# EAGLE board ESP32_BLDC_Motor_Driver-Panel (EAGLE 9.6.2), part 1 of 4
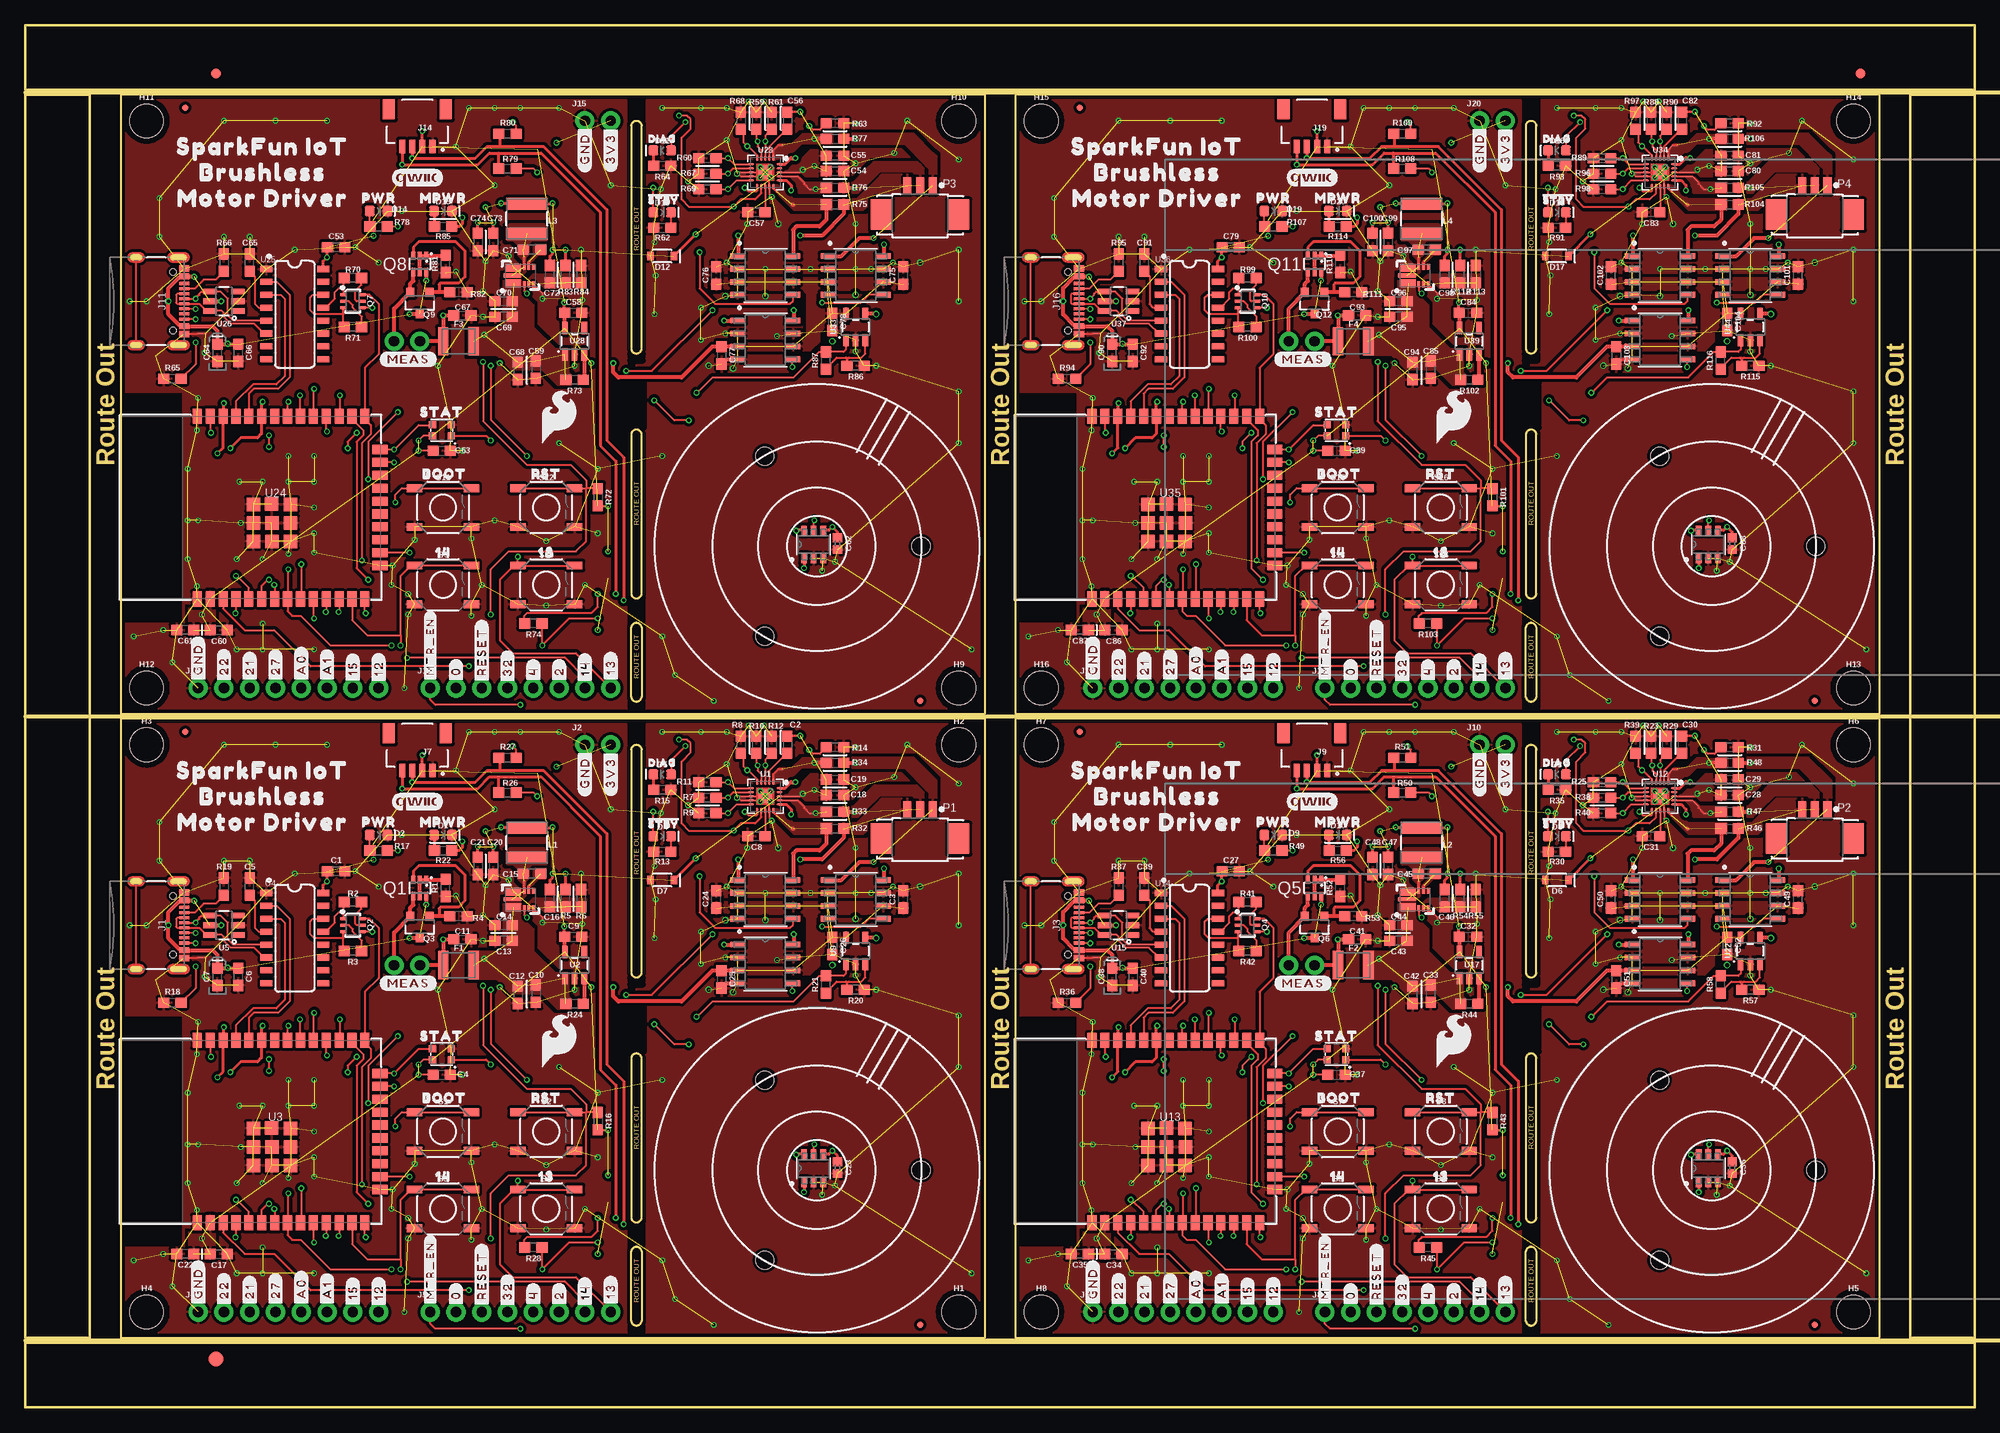
[diagram p0: board, top side]
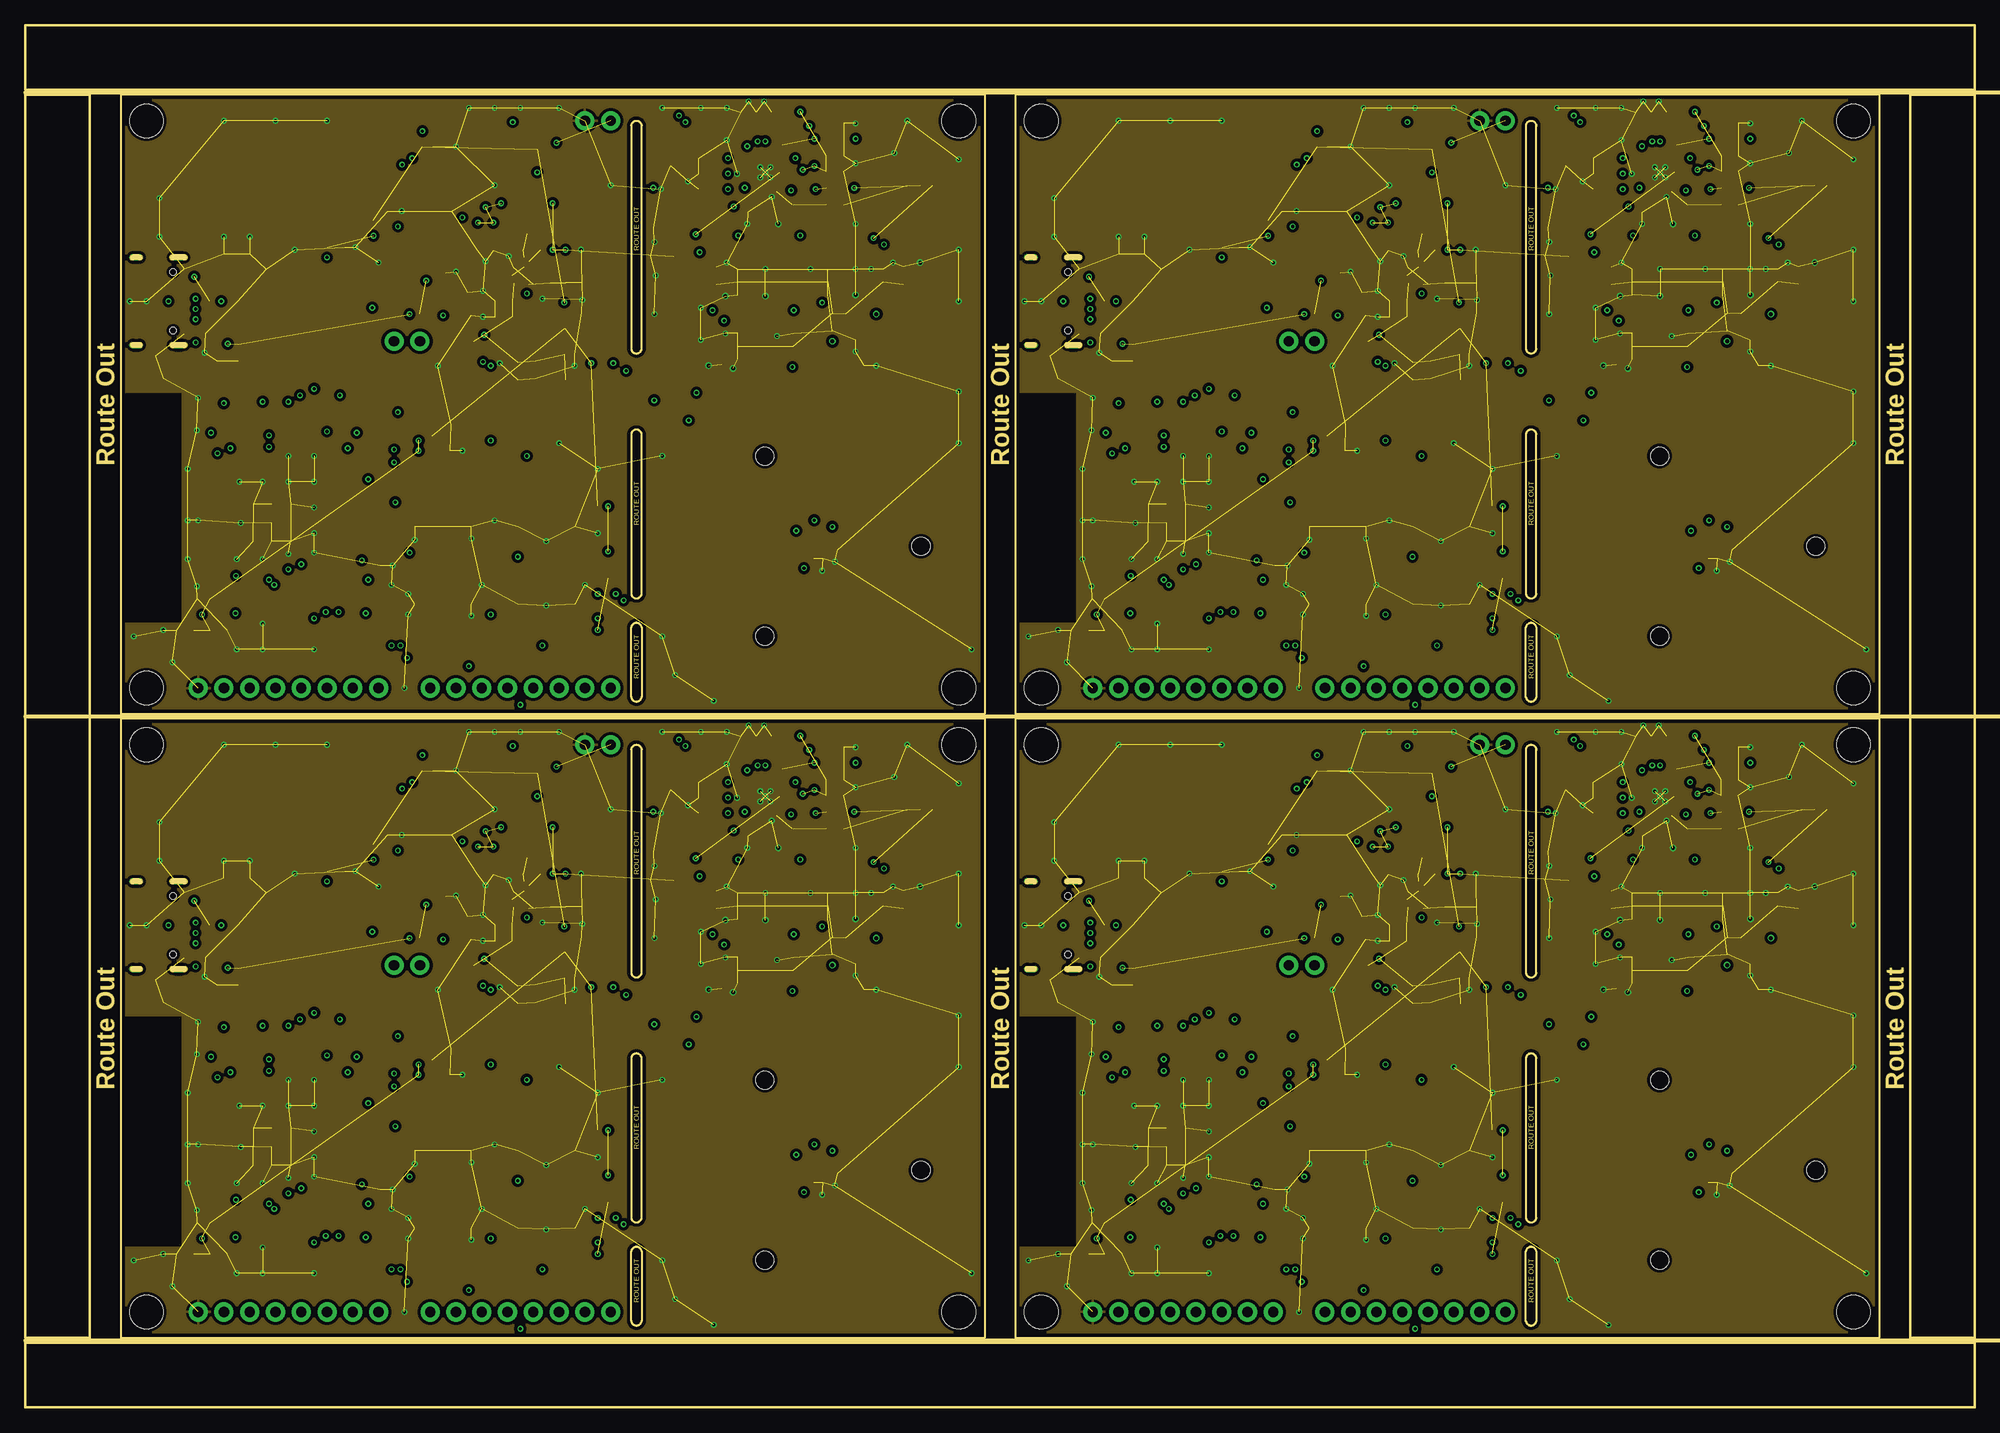
[diagram p1: board, inner layer Route2]
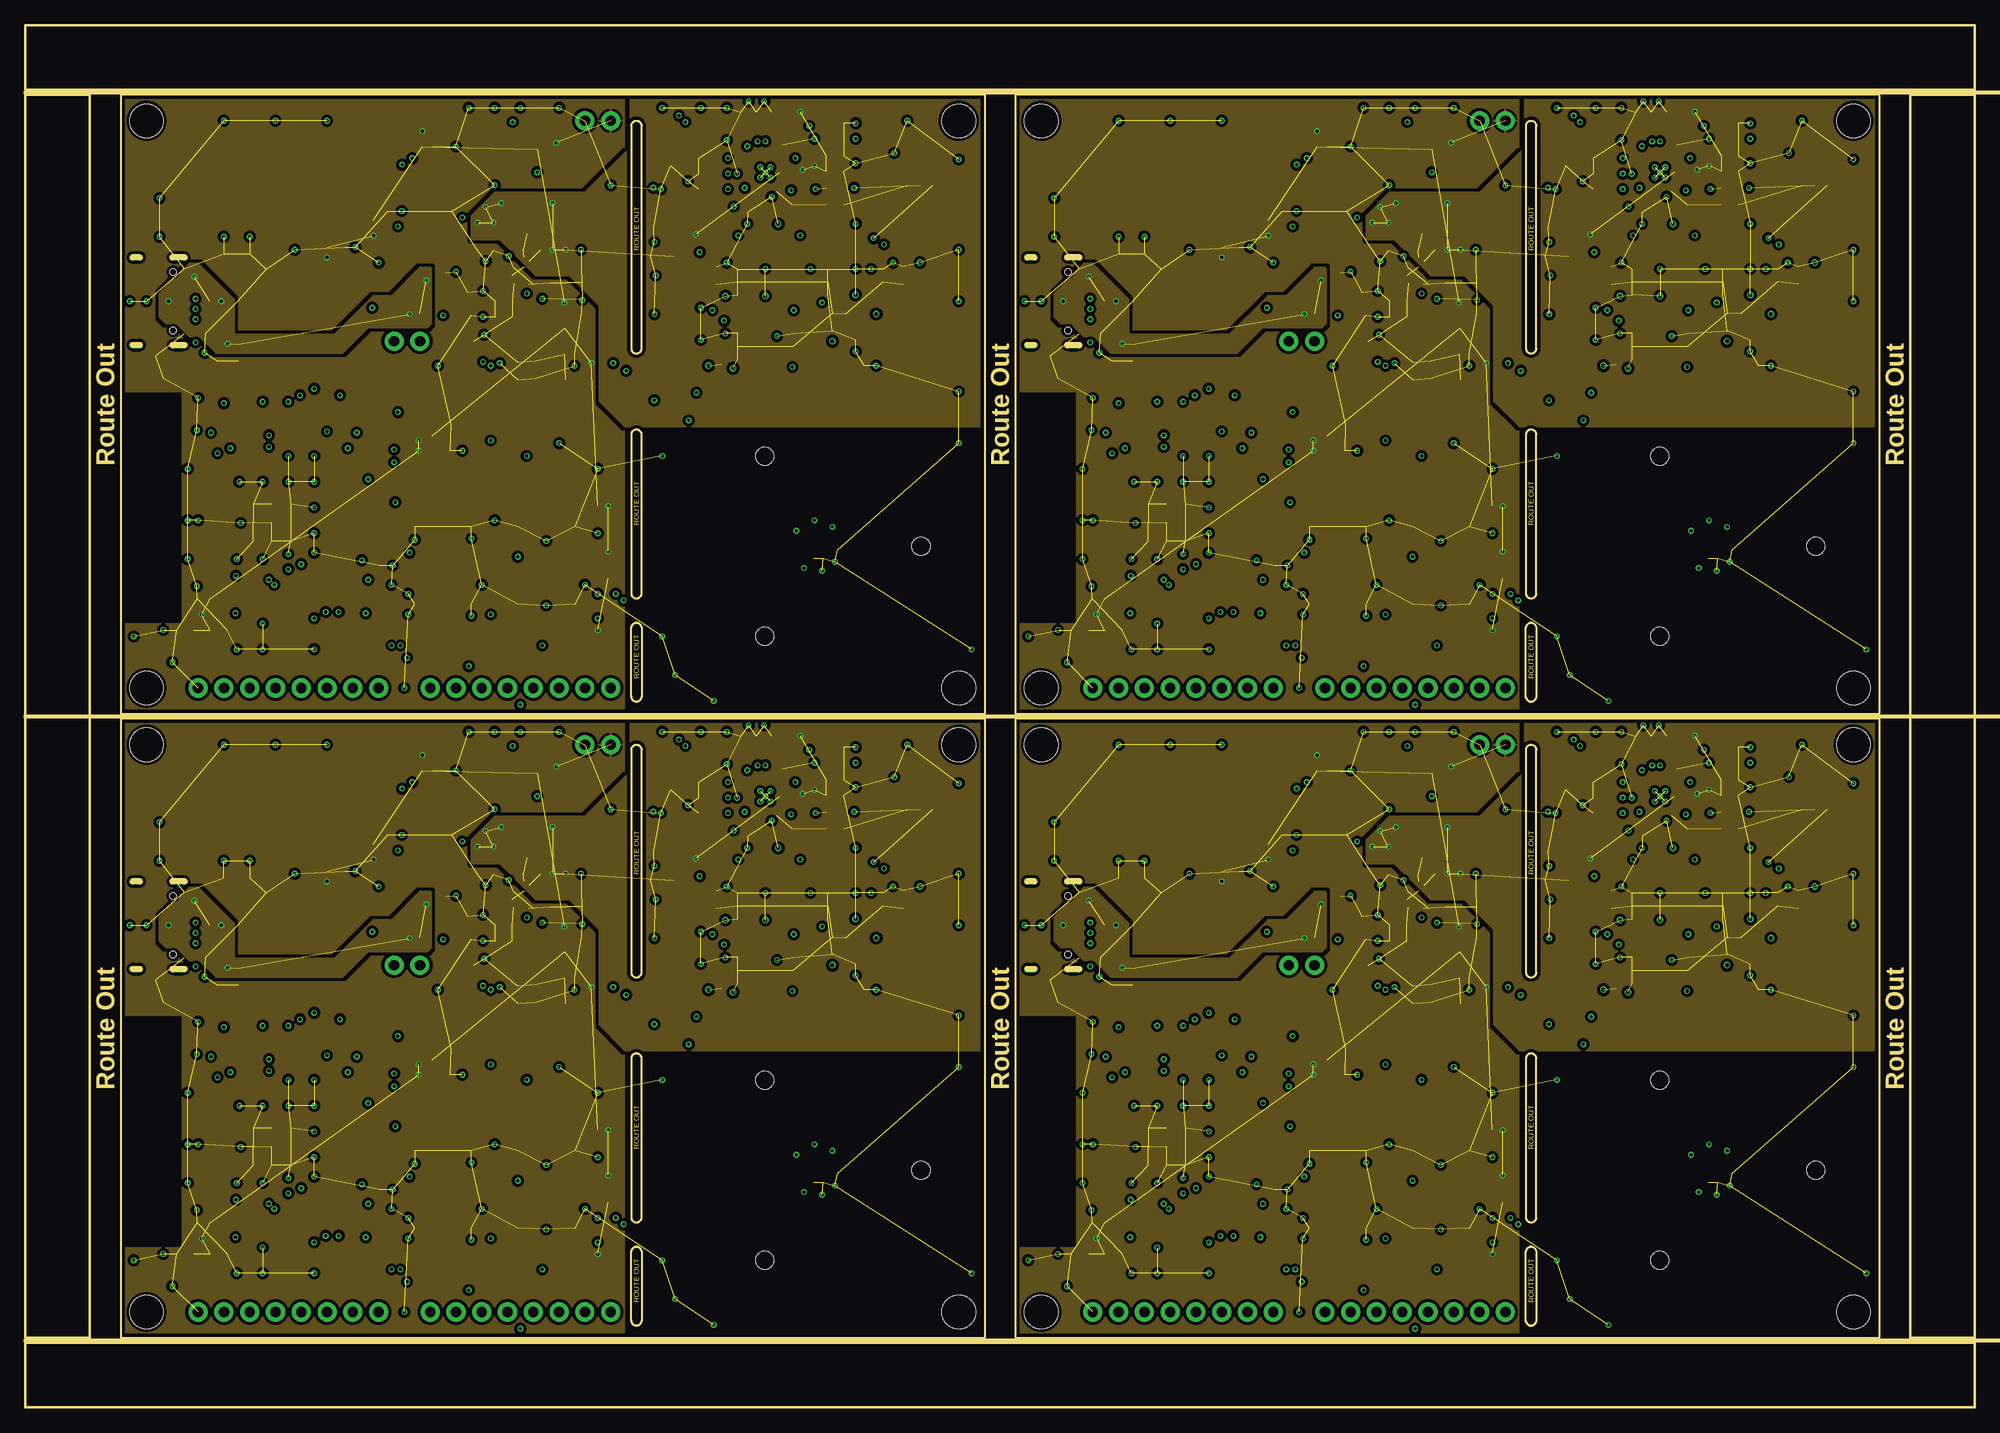
[diagram p2: board, inner layer Route15]
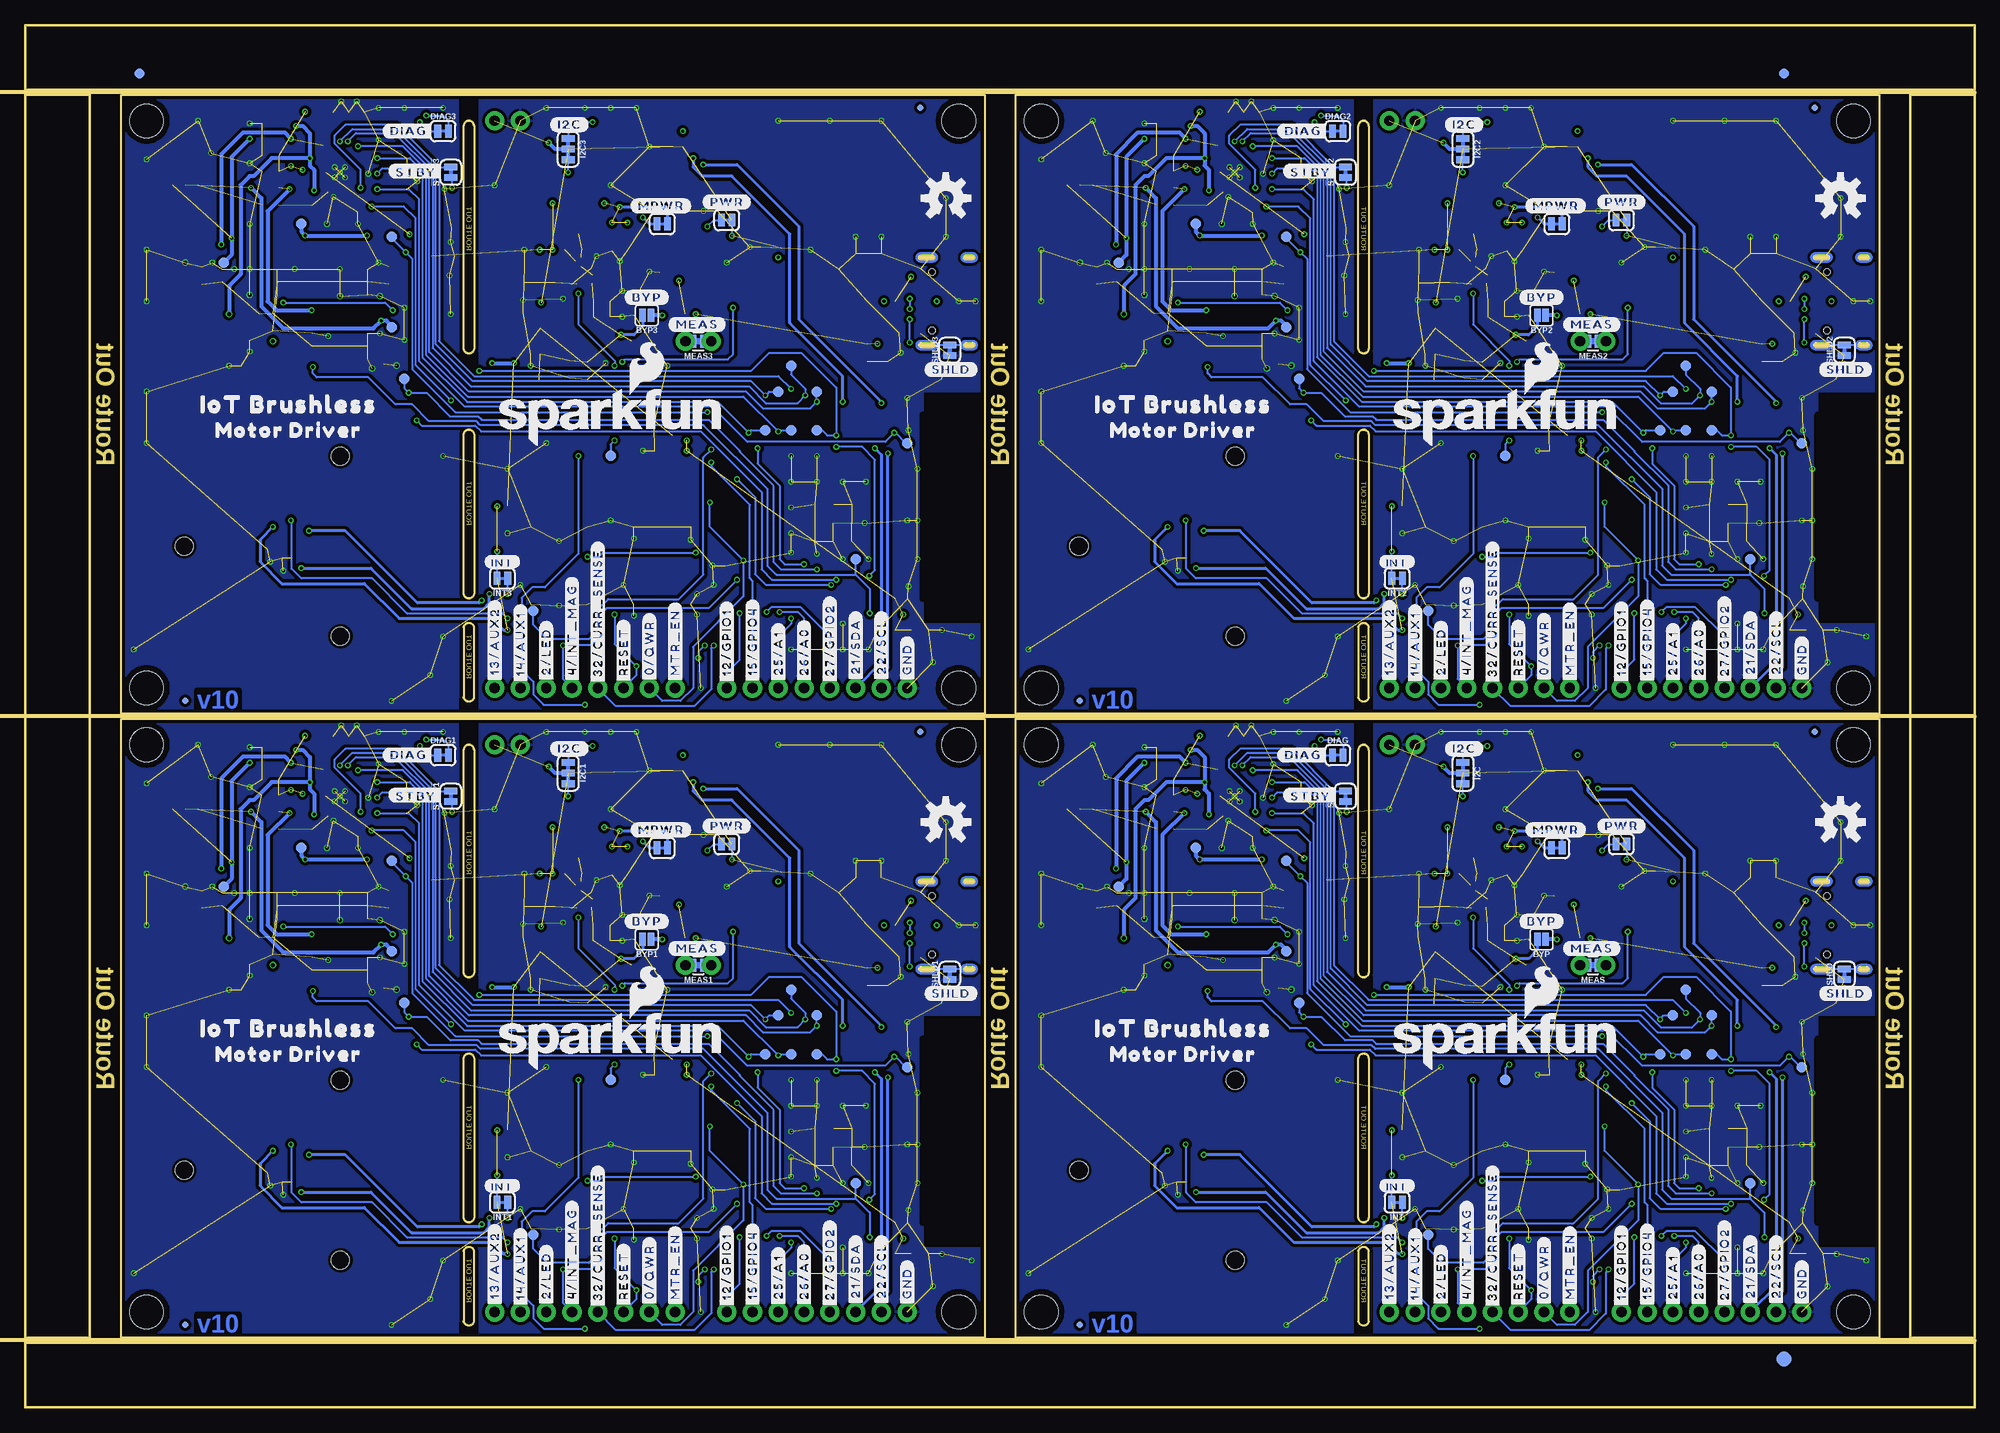
[diagram p3: board, bottom side, seen from below]

Size 192.02 x 136.14 mm. Coordinates in mm from the lower left corner, seen from the top.
Outline: 9.4,6.86 94.49,6.86 94.49,67.82 9.4,67.82 9.4,6.86
Outline: 59.69,64.77 59.69,42.8 arc166 60.71,42.8 60.71,64.77 arc180 59.69,64.77
Outline: 60.71,34.42 arc166 59.69,34.42 59.69,18.67 arc166 60.71,18.67 60.71,34.42
Outline: 60.71,15.37 arc166 59.69,15.37 59.69,8.51 arc166 60.71,8.51 60.71,15.37
Outline: 97.54,6.86 182.63,6.86 182.63,67.82 97.54,67.82 97.54,6.86
Outline: 147.83,64.77 147.83,42.8 arc166 148.84,42.8 148.84,64.77 arc180 147.83,64.77
Outline: 148.84,34.42 arc166 147.83,34.42 147.83,18.67 arc166 148.84,18.67 148.84,34.42
Outline: 148.84,15.37 arc166 147.83,15.37 147.83,8.51 arc166 148.84,8.51 148.84,15.37
Outline: 9.4,68.33 94.49,68.33 94.49,129.29 9.4,129.29 9.4,68.33
Outline: 59.69,126.24 59.69,104.27 arc166 60.71,104.27 60.71,126.24 arc180 59.69,126.24
Outline: 60.71,95.89 arc166 59.69,95.89 59.69,80.14 arc166 60.71,80.14 60.71,95.89
Outline: 60.71,76.84 arc166 59.69,76.84 59.69,69.98 arc166 60.71,69.98 60.71,76.84
Outline: 97.54,68.33 182.63,68.33 182.63,129.29 97.54,129.29 97.54,68.33
Outline: 147.83,126.24 147.83,104.27 arc166 148.84,104.27 148.84,126.24 arc180 147.83,126.24
Outline: 148.84,95.89 arc166 147.83,95.89 147.83,80.14 arc166 148.84,80.14 148.84,95.89
Outline: 148.84,76.84 arc166 147.83,76.84 147.83,69.98 arc166 148.84,69.98 148.84,76.84
Outline: 0,6.35 192.02,6.35 192.02,0 0,0 0,6.35
Outline: 185.67,129.29 192.02,129.29 192.02,6.86 185.67,6.86 185.67,129.29
Outline: 0,136.14 192.02,136.14 192.02,129.79 0,129.79 0,136.14
Outline: 0,129.29 6.35,129.29 6.35,6.86 0,6.86 0,129.29
Copper layers (1*2*15*16): Top 0.035559375mm / dielectric 0.47751875mm / Route2 0.035559375mm / dielectric 0.47751875mm / Route15 0.035559375mm / dielectric 0.47751875mm / Bottom 0.035559375mm
Design rules "ESP32_BLDC_Motor_Driver": minimum track width 5mil, minimum drill 0.2mm, track to track 5mil, track to pad 5mil, pad to pad 5mil, via to via 5mil, smd to smd 5mil, copper to edge 7mil, drill to drill 7mil, minimum pad ring 5mil, minimum via ring 5mil, stop-mask expansion 2.5mil, vias tented up to drill 25mil, thermal gap 10mil
tKeepout: area 9.5,18.2 to 15.5,36.2; area 97.7,18.2 to 103.6,36.2; area 9.5,79.6 to 15.5,97.7; area 97.7,79.6 to 103.6,97.7
tRestrict: area 59.6,65 to 60.8,67.4; area 59.6,15.5 to 60.8,18.3; area 59.6,7.1 to 60.8,8.4; area 59.6,35.1 to 61,39.5; area 59.6,41.7 to 60.8,42.3; area 59.6,40.9 to 59.8,41.7; area 147.7,65 to 149,67.4; area 147.7,15.5 to 149,18.3; area 147.7,7.1 to 149,8.4; area 147.7,35.1 to 149.1,39.5; area 147.7,41.7 to 149,42.3; area 147.7,40.9 to 148,41.7; area 59.6,126.5 to 60.8,128.9; area 59.6,77 to 60.8,79.8; area 59.6,68.6 to 60.8,69.8; area 59.6,96.5 to 61,101; area 59.6,103.1 to 60.8,103.8; area 59.6,102.4 to 59.8,103.1; area 147.7,126.5 to 149,128.9; area 147.7,77 to 149,79.8; area 147.7,68.6 to 149,69.8; area 147.7,96.5 to 149.1,101; area 147.7,103.1 to 149,103.8; area 147.7,102.4 to 148,103.1
bRestrict: area 9.5,18.2 to 15.5,36.3; area 59.6,65 to 60.8,67.4; area 59.6,7.1 to 60.8,8.4; area 59.6,41.8 to 60.8,42.4; area 59.6,40.9 to 60.1,41.8; area 97.7,18.2 to 103.6,36.3; area 147.7,65 to 149,67.4; area 147.7,7.1 to 149,8.4; area 147.7,41.8 to 149,42.4; area 147.7,40.9 to 148.2,41.8; area 9.5,79.6 to 15.5,97.8; area 59.6,126.5 to 60.8,128.9; area 59.6,68.6 to 60.8,69.8; area 59.6,103.3 to 60.8,103.9; area 59.6,102.4 to 60.1,103.3; area 97.7,79.6 to 103.6,97.8; area 147.7,126.5 to 149,128.9; area 147.7,68.6 to 149,69.8; area 147.7,103.3 to 149,103.9; area 147.7,102.4 to 148.2,103.3
Milling: 3 lines

## Footprints (pad centres in the part's own frame; a part is rotated, then mirrored left to right if it is on the bottom)
SMT-JUMPER_2_NC_TRACE_SILK = smd 0.66 x 1.27: 1 -0.521,0; 2 0.521,0
SMT-JUMPER_2_NO_SILK = smd 0.635 x 1.27: 1 -0.406,0; 2 0.406,0
0603 = smd 1.1 x 1: 1 -0.85,0; 2 0.85,0
0603-POLAR = smd 1.1 x 1: + 0.85,0; - -0.85,0
0402 = smd 0.85 x 0.9: 1 -0.58,0; 2 0.58,0
LED-0603 = smd 1 x 1: A -0.877,0; C 0.877,0
SOD-323 = smd 0.63 x 0.83: A 1.15,0; C -1.15,0
FIDUCIAL-1X2 = smd 1 x 1: 1 0,0
FIDUCIAL-1.5X3 = smd 1.5 x 1.5: 1 0,0
1210 = smd 1 x 2.8: 1 -1.5,0; 2 1.5,0
FIDUCIAL-MICRO = smd 0.635 x 0.635: 1 0,0
STAND-OFF = hole 3.302: 0,0
SMT-JUMPER_3_2-NC_TRACE_SILK = smd 0.66 x 1.27: 1 -1.041,0; 2 0,0; 3 1.041,0
USB-C-16P_4LAYER-PADS = smd 0.3 x 1: A5 -1.25,-0.34; A6 -0.25,-0.34; A7 0.25,-0.34; A8 1.25,-0.34; B5 1.75,-0.34; B6 0.75,-0.34; B7 -0.75,-0.34; B8 -1.75,-0.34 | smd 0.6 x 1: GND -3.225,-0.34; GND2 3.225,-0.34; VBUS1 -2.45,-0.34; VBUS2 2.45,-0.34 | drill 0.4 pad 0.6 long: SHLD1 -4.318,-0.915; SHLD2 4.318,-0.915; SHLD3 -4.318,-5.095; SHLD4 4.318,-5.095 | hole 0.65: -2.89,-1.445; 2.89,-1.445
1X02_NO_SILK = drill 1.016 pad 1.88: 1 0,0; 2 2.54,0
1X08_NO_SILK = drill 1.016 pad 1.88: 1 0,0; 2 2.54,0; 3 5.08,0; 4 7.62,0; 5 10.16,0; 6 12.7,0; 7 15.24,0; 8 17.78,0
JST04_1MM_RA = smd 0.6 x 1.35: 1 -1.5,0; 2 -0.5,0; 3 0.5,0; 4 1.5,0 | smd 1.2 x 2: NC1 2.8,-3.675; NC2 -2.8,-3.675
INDUCTOR_4X4MM = smd 4.089 x 1.143: P$1 0,1.473; P$2 0,-1.473
COMBO-JUMPER_2_NC_TRACE = smd 0.635 x 1.27: 1 -0.508,0; 2 0.508,0 | drill 1.016 pad 1.88: 3 -1.27,0; 4 1.27,0
MOLEX_0532610371 = smd 0.8 x 1.6: 1 1.25,0; 2 0,0; 3 -1.25,0 | smd 2.1 x 3: 4 -3.8,-2.9; 5 3.8,-2.9
SOT363_PHILIPS = smd 0.4 x 0.8: 1 -0.65,-0.8; 2 0,-0.8; 3 0.65,-0.8; 4 0.65,0.8; 5 0,0.8; 6 -0.65,0.8
SC70-6 = smd 0.3 x 0.66: 1 -0.65,-0.92; 2 0,-0.92; 3 0.65,-0.92; 4 0.65,0.92; 5 0,0.92; 6 -0.65,0.92
SOT23-3 = smd 0.8 x 0.9: 1 -0.95,-1; 2 0.95,-1; 3 0,1.1
TACTILE_SWITCH_SMD_5.2MM = smd 1.524 x 0.762: 1 -2.794,1.905; 2 2.794,1.905; 3 -2.794,-1.905; 4 2.794,-1.905
WS2812-2020 = smd 0.7 x 0.7: DI -0.915,0.55; DO 0.915,-0.55; GND 0.915,0.55; VCC -0.915,-0.55
PAD.03X.04 = smd 1.016 x 1.016: 1 0,0
QFN-20 = smd 0.6 x 0.2: 1 -1.4,0.8; 2 -1.4,0.4; 3 -1.4,0; 4 -1.4,-0.4; 5 -1.4,-0.8; 11 1.4,-0.8; 12 1.4,-0.4; 13 1.4,0; 14 1.4,0.4; 15 1.4,0.8 | smd 0.2 x 0.6: 6 -0.8,-1.4; 7 -0.4,-1.4; 8 0,-1.4; 9 0.4,-1.4; 10 0.8,-1.4; 16 0.8,1.4; 17 0.4,1.4; 18 0,1.4; 19 -0.4,1.4; 20 -0.8,1.4 | smd 1.27 x 1.27: PAD 0,0
SOT23-5 = smd 0.55 x 1.2: 1 -0.95,-1.3; 2 0,-1.3; 3 0.95,-1.3; 4 0.95,1.3; 5 -0.95,1.3
ESP-WROOM-32D = smd 0.9 x 1.5: 1 6.43,9; 2 5.16,9; 3 3.89,9; 4 2.62,9; 5 1.35,9; 6 0.08,9; 7 -1.19,9; 8 -2.46,9; 9 -3.73,9; 10 -5,9; 11 -6.27,9; 12 -7.54,9; 13 -8.81,9; 14 -10.08,9; 25 -10.08,-9; 26 -8.81,-9; 27 -7.54,-9; 28 -6.27,-9; 29 -5,-9; 30 -3.73,-9; 31 -2.46,-9; 32 -1.19,-9; 33 0.08,-9; 34 1.35,-9; 35 2.62,-9; 36 3.89,-9; 37 5.16,-9; 38 6.43,-9 | smd 1.5 x 0.9: 15 -11.57,5.715; 16 -11.57,4.445; 17 -11.57,3.175; 18 -11.57,1.905; 19 -11.57,0.635; 20 -11.57,-0.635; 21 -11.57,-1.905; 22 -11.57,-3.175; 23 -11.57,-4.445; 24 -11.57,-5.715 | smd 1.33 x 1.33: GND -0.912,1.531; GNDT1 -2.751,3.346; GNDT2 -2.761,1.516; GNDT3 -2.751,-0.314; GNDT4 -0.891,-0.324; GNDT5 0.909,-0.314; GNDT6 0.909,1.516; GNDT7 0.909,3.346; GNDT8 -0.921,3.346
SO016 = smd 0.6 x 1.2: 1 -4.445,-2.8; 2 -3.175,-2.8; 3 -1.905,-2.8; 4 -0.635,-2.8; 5 0.635,-2.8; 6 1.905,-2.8; 7 3.175,-2.8; 8 4.445,-2.8; 9 4.445,2.8; 10 3.175,2.8; 11 1.905,2.8; 12 0.635,2.8; 13 -0.635,2.8; 14 -1.905,2.8; 15 -3.175,2.8; 16 -4.445,2.8
SOT-23-6 = smd 0.55 x 1.35: 1 -0.95,-1.375; 2 0,-1.375; 3 0.95,-1.375; 4 0.95,1.375; 5 0,1.375; 6 -0.95,1.375
V-DFN3020-13 = smd 1.5 x 0.8: P$1 -0.675,-0.75; P$8 -0.675,0.75 | smd 0.3 x 0.6: P$2 0.375,-0.85; P$3 0.825,-0.85; P$4 1.275,-0.85; P$5 1.275,0.85; P$6 0.825,0.85; P$7 0.375,0.85 | smd 1.73 x 0.4: P$9 -0.79,0
D8_TEX = smd 1.46 x 0.559: 1 -2.724,1.905; 2 -2.724,0.635; 3 -2.724,-0.635; 4 -2.724,-1.905; 5 2.724,-1.905; 6 2.724,-0.635; 7 2.724,0.635; 8 2.724,1.905
SOT23-6_DBV_TEX = smd 0.978 x 0.559: 1 -1.365,0.95; 2 -1.365,0; 3 -1.365,-0.95; 4 1.365,-0.95; 5 1.365,0; 6 1.365,0.95
OT-EM3215 = hole 1.778: -8.877,5.125; 0,-10.25; 8.877,5.125

## Placement (x,y rotation side)
!STBY  JUMPER-SMT_2_NC_TRACE_SILK  [SMT-JUMPER_2_NC_TRACE_SILK]  61.98,60.2 90 bottom
!STBY1  JUMPER-SMT_2_NC_TRACE_SILK  [SMT-JUMPER_2_NC_TRACE_SILK]  150.11,60.2 90 bottom
!STBY2  JUMPER-SMT_2_NC_TRACE_SILK  [SMT-JUMPER_2_NC_TRACE_SILK]  61.98,121.67 90 bottom
!STBY3  JUMPER-SMT_2_NC_TRACE_SILK  [SMT-JUMPER_2_NC_TRACE_SILK]  150.11,121.67 90 bottom
BYP  JUMPER-SMT_2_NO_SILK  [SMT-JUMPER_2_NO_SILK]  42.67,46.1 180 bottom
BYP1  JUMPER-SMT_2_NO_SILK  [SMT-JUMPER_2_NO_SILK]  130.81,46.1 180 bottom
BYP2  JUMPER-SMT_2_NO_SILK  [SMT-JUMPER_2_NO_SILK]  42.67,107.57 180 bottom
BYP3  JUMPER-SMT_2_NO_SILK  [SMT-JUMPER_2_NO_SILK]  130.81,107.57 180 bottom
C1  0.1uF  [0603]  30.61,52.83 0 top
C2  0.1uF  [0603]  75.06,65.28 270 top
C3  0.1uF  [0603]  86.49,50.04 90 top
C4  0.1uF  [0603]  41.02,32.77 0 top
C5  10nF  [0603]  22.1,51.31 90 top
C6  0.1uF  [0603]  20.95,42.42 270 top
C7  10uF  [0603-POLAR]  18.92,42.42 90 top
C8  0.1uF  [0603]  72.01,56.26 180 top
C9  2.2uF  [0603]  53.97,46.35 0 top
C10  1.0uF  [0603]  50.29,40.77 270 top
C11  0.1uF  [0603]  43.05,46.1 0 top
C12  0.1uF  [0603]  48.51,40.64 270 top
C13  10uF  [0603]  47.12,45.97 180 top
C14  10uF  [0603]  47.12,47.5 180 top
C15  0.1uF  [0603]  49.91,52.58 180 top
C16  33pF  [0603]  51.69,50.16 90 top
C17  0.1uF  [0603]  19.05,15.11 0 top
C18  10uF  [0603]  79.76,60.32 0 top
C19  0.1uF  [0603]  79.76,61.85 0 top
C20  22uF  [0603]  46.1,53.34 270 top
C21  22uF  [0603]  44.58,53.34 270 top
C22  22uF  [0603]  15.75,15.11 180 top
C23  0.1uF  [0402]  80.01,23.62 270 top
C24  0.1uF  [0603]  68.07,50.04 90 top
C25  0.1uF  [0603]  68.58,42.16 270 top
C26  0.1uF  [0603]  79.5,45.47 270 top
C27  0.1uF  [0603]  118.74,52.83 0 top
C28  10uF  [0603]  167.89,60.32 0 top
C29  0.1uF  [0603]  167.89,61.85 0 top
C30  0.1uF  [0603]  163.19,65.28 270 top
C31  0.1uF  [0603]  160.15,56.26 180 top
C32  2.2uF  [0603]  142.11,46.35 0 top
C33  1.0uF  [0603]  138.43,40.77 270 top
C34  0.1uF  [0603]  107.19,15.11 0 top
C35  22uF  [0603]  103.89,15.11 180 top
C36  0.1uF  [0402]  168.15,23.62 270 top
C37  0.1uF  [0603]  129.16,32.77 0 top
C38  10uF  [0603-POLAR]  107.06,42.42 90 top
C39  10nF  [0603]  110.24,51.31 90 top
C40  0.1uF  [0603]  109.09,42.42 270 top
C41  0.1uF  [0603]  131.19,46.1 0 top
C42  0.1uF  [0603]  136.65,40.64 270 top
C43  10uF  [0603]  135.25,45.97 180 top
C44  10uF  [0603]  135.25,47.5 180 top
C45  0.1uF  [0603]  138.05,52.58 180 top
C46  33pF  [0603]  139.83,50.16 90 top
C47  22uF  [0603]  134.24,53.34 270 top
C48  22uF  [0603]  132.72,53.34 270 top
C49  0.1uF  [0603]  174.62,50.04 90 top
C50  0.1uF  [0603]  156.21,50.04 90 top
C51  0.1uF  [0603]  156.72,42.16 270 top
C52  0.1uF  [0603]  167.64,45.47 270 top
C53  0.1uF  [0603]  30.61,114.3 0 top
C54  10uF  [0603]  79.76,121.79 0 top
C55  0.1uF  [0603]  79.76,123.32 0 top
C56  0.1uF  [0603]  75.06,126.75 270 top
C57  0.1uF  [0603]  72.01,117.73 180 top
C58  2.2uF  [0603]  53.97,107.82 0 top
C59  1.0uF  [0603]  50.29,102.23 270 top
C60  0.1uF  [0603]  19.05,76.58 0 top
C61  22uF  [0603]  15.75,76.58 180 top
C62  0.1uF  [0402]  80.01,85.09 270 top
C63  0.1uF  [0603]  41.02,94.23 0 top
C64  10uF  [0603-POLAR]  18.92,103.89 90 top
C65  10nF  [0603]  22.1,112.78 90 top
C66  0.1uF  [0603]  20.95,103.89 270 top
C67  0.1uF  [0603]  43.05,107.57 0 top
C68  0.1uF  [0603]  48.51,102.11 270 top
C69  10uF  [0603]  47.12,107.44 180 top
C70  10uF  [0603]  47.12,108.97 180 top
C71  0.1uF  [0603]  49.91,114.05 180 top
C72  33pF  [0603]  51.69,111.63 90 top
C73  22uF  [0603]  46.1,114.81 270 top
C74  22uF  [0603]  44.58,114.81 270 top
C75  0.1uF  [0603]  86.49,111.51 90 top
C76  0.1uF  [0603]  68.07,111.51 90 top
C77  0.1uF  [0603]  68.58,103.63 270 top
C78  0.1uF  [0603]  79.5,106.93 270 top
C79  0.1uF  [0603]  118.74,114.3 0 top
C80  10uF  [0603]  167.89,121.79 0 top
C81  0.1uF  [0603]  167.89,123.32 0 top
C82  0.1uF  [0603]  163.19,126.75 270 top
C83  0.1uF  [0603]  160.15,117.73 180 top
C84  2.2uF  [0603]  142.11,107.82 0 top
C85  1.0uF  [0603]  138.43,102.23 270 top
C86  0.1uF  [0603]  107.19,76.58 0 top
C87  22uF  [0603]  103.89,76.58 180 top
C88  0.1uF  [0402]  168.15,85.09 270 top
C89  0.1uF  [0603]  129.16,94.23 0 top
C90  10uF  [0603-POLAR]  107.06,103.89 90 top
C91  10nF  [0603]  110.24,112.78 90 top
C92  0.1uF  [0603]  109.09,103.89 270 top
C93  0.1uF  [0603]  131.19,107.57 0 top
C94  0.1uF  [0603]  136.65,102.11 270 top
C95  10uF  [0603]  135.25,107.44 180 top
C96  10uF  [0603]  135.25,108.97 180 top
C97  0.1uF  [0603]  138.05,114.05 180 top
C98  33pF  [0603]  139.83,111.63 90 top
C99  22uF  [0603]  134.24,114.81 270 top
C100  22uF  [0603]  132.72,114.81 270 top
C101  0.1uF  [0603]  174.62,111.51 90 top
C102  0.1uF  [0603]  156.21,111.51 90 top
C103  0.1uF  [0603]  156.72,103.63 270 top
C104  0.1uF  [0603]  167.64,106.93 270 top
D1  RED  [LED-0603]  41.15,56.39 0 top
D2  RED  [LED-0603]  34.8,56.39 0 top
D3  GREEN  [LED-0603]  150.88,62.36 180 top
D4  BLUE  [LED-0603]  62.74,56.26 0 top
D5  GREEN  [LED-0603]  62.74,62.36 180 top
D6  3.3V  [SOD-323]  150.88,51.94 180 top
D7  3.3V  [SOD-323]  62.74,51.94 180 top
D8  BLUE  [LED-0603]  150.88,56.26 0 top
D9  RED  [LED-0603]  122.94,56.39 0 top
D10  RED  [LED-0603]  129.29,56.39 0 top
D11  GREEN  [LED-0603]  62.74,123.83 180 top
D12  3.3V  [SOD-323]  62.74,113.41 180 top
D13  BLUE  [LED-0603]  62.74,117.73 0 top
D14  RED  [LED-0603]  34.8,117.86 0 top
D15  RED  [LED-0603]  41.15,117.86 0 top
D16  GREEN  [LED-0603]  150.88,123.83 180 top
D17  3.3V  [SOD-323]  150.88,113.41 180 top
D18  BLUE  [LED-0603]  150.88,117.73 0 top
D19  RED  [LED-0603]  122.94,117.86 0 top
D20  RED  [LED-0603]  129.29,117.86 0 top
DIAG  JUMPER-SMT_2_NC_TRACE_SILK  [SMT-JUMPER_2_NC_TRACE_SILK]  62.74,64.26 0 bottom
DIAG1  JUMPER-SMT_2_NC_TRACE_SILK  [SMT-JUMPER_2_NC_TRACE_SILK]  150.88,64.26 0 bottom
DIAG2  JUMPER-SMT_2_NC_TRACE_SILK  [SMT-JUMPER_2_NC_TRACE_SILK]  62.74,125.73 0 bottom
DIAG3  JUMPER-SMT_2_NC_TRACE_SILK  [SMT-JUMPER_2_NC_TRACE_SILK]  150.88,125.73 0 bottom
E$1  [FIDUCIAL-1X2]  18.8,131.38 0 top
E$2  [FIDUCIAL-1X2]  18.8,131.38 0 bottom
E$3  [FIDUCIAL-1X2]  180.78,131.38 0 top
E$4  [FIDUCIAL-1X2]  180.78,131.38 0 bottom
E$5  [FIDUCIAL-1.5X3]  18.8,4.76 0 top
E$6  [FIDUCIAL-1.5X3]  18.8,4.76 0 bottom
F1  6V/2A  [1210]  42.67,43.56 0 top
F2  6V/2A  [1210]  130.81,43.56 0 top
F3  6V/2A  [1210]  42.67,105.03 0 top
F4  6V/2A  [1210]  130.81,105.03 0 top
FD1  FIDUCIALUFIDUCIAL  [FIDUCIAL-MICRO]  88.14,8.13 0 bottom
FD2  FIDUCIALUFIDUCIAL  [FIDUCIAL-MICRO]  88.14,8.13 0 top
FD3  FIDUCIALUFIDUCIAL  [FIDUCIAL-MICRO]  15.75,66.55 0 bottom
FD4  FIDUCIALUFIDUCIAL  [FIDUCIAL-MICRO]  15.75,66.55 0 top
FD5  FIDUCIALUFIDUCIAL  [FIDUCIAL-MICRO]  176.28,8.13 0 bottom
FD6  FIDUCIALUFIDUCIAL  [FIDUCIAL-MICRO]  176.28,8.13 0 top
FD7  FIDUCIALUFIDUCIAL  [FIDUCIAL-MICRO]  103.89,66.55 0 bottom
FD8  FIDUCIALUFIDUCIAL  [FIDUCIAL-MICRO]  103.89,66.55 0 top
FD9  FIDUCIALUFIDUCIAL  [FIDUCIAL-MICRO]  88.14,69.6 0 bottom
FD10  FIDUCIALUFIDUCIAL  [FIDUCIAL-MICRO]  88.14,69.6 0 top
FD11  FIDUCIALUFIDUCIAL  [FIDUCIAL-MICRO]  15.75,128.02 0 bottom
FD12  FIDUCIALUFIDUCIAL  [FIDUCIAL-MICRO]  15.75,128.02 0 top
FD13  FIDUCIALUFIDUCIAL  [FIDUCIAL-MICRO]  176.28,69.6 0 bottom
FD14  FIDUCIALUFIDUCIAL  [FIDUCIAL-MICRO]  176.28,69.6 0 top
FD15  FIDUCIALUFIDUCIAL  [FIDUCIAL-MICRO]  103.89,128.02 0 bottom
FD16  FIDUCIALUFIDUCIAL  [FIDUCIAL-MICRO]  103.89,128.02 0 top
H1  STAND-OFF  [STAND-OFF]  91.95,9.4 0 top
H2  STAND-OFF  [STAND-OFF]  91.95,65.28 0 top
H3  STAND-OFF  [STAND-OFF]  11.94,65.28 0 top
H4  STAND-OFF  [STAND-OFF]  11.94,9.4 0 top
H5  STAND-OFF  [STAND-OFF]  180.09,9.4 0 top
H6  STAND-OFF  [STAND-OFF]  180.09,65.28 0 top
H7  STAND-OFF  [STAND-OFF]  100.08,65.28 0 top
H8  STAND-OFF  [STAND-OFF]  100.08,9.4 0 top
H9  STAND-OFF  [STAND-OFF]  91.95,70.87 0 top
H10  STAND-OFF  [STAND-OFF]  91.95,126.75 0 top
H11  STAND-OFF  [STAND-OFF]  11.94,126.75 0 top
H12  STAND-OFF  [STAND-OFF]  11.94,70.87 0 top
H13  STAND-OFF  [STAND-OFF]  180.09,70.87 0 top
H14  STAND-OFF  [STAND-OFF]  180.09,126.75 0 top
H15  STAND-OFF  [STAND-OFF]  100.08,126.75 0 top
H16  STAND-OFF  [STAND-OFF]  100.08,70.87 0 top
I2C  JUMPER-SMT_3_2-NC_TRACE_SILK  [SMT-JUMPER_3_2-NC_TRACE_SILK]  50.42,62.48 270 bottom
I2C1  JUMPER-SMT_3_2-NC_TRACE_SILK  [SMT-JUMPER_3_2-NC_TRACE_SILK]  138.56,62.48 270 bottom
I2C2  JUMPER-SMT_3_2-NC_TRACE_SILK  [SMT-JUMPER_3_2-NC_TRACE_SILK]  50.42,123.95 270 bottom
I2C3  JUMPER-SMT_3_2-NC_TRACE_SILK  [SMT-JUMPER_3_2-NC_TRACE_SILK]  138.56,123.95 270 bottom
INT  JUMPER-SMT_2_NC_TRACE_SILK  [SMT-JUMPER_2_NC_TRACE_SILK]  56.9,20.19 180 bottom
INT1  JUMPER-SMT_2_NC_TRACE_SILK  [SMT-JUMPER_2_NC_TRACE_SILK]  145.03,20.19 180 bottom
INT2  JUMPER-SMT_2_NC_TRACE_SILK  [SMT-JUMPER_2_NC_TRACE_SILK]  56.9,81.66 180 bottom
INT3  JUMPER-SMT_2_NC_TRACE_SILK  [SMT-JUMPER_2_NC_TRACE_SILK]  145.03,81.66 180 bottom
J1  USB-C Connector  [USB-C-16P_4LAYER-PADS]  16,47.5 270 top
J2  [1X02_NO_SILK]  55.12,65.28 0 top
J3  USB-C Connector  [USB-C-16P_4LAYER-PADS]  104.14,47.5 270 top
J4  Breadboard Connector  [1X08_NO_SILK]  17.02,9.4 0 top
J5  Breadboard Headers  [1X08_NO_SILK]  39.88,9.4 0 top
J6  Breadboard Connector  [1X08_NO_SILK]  105.16,9.4 0 top
J7  QWIIC_RIGHT_ANGLE  [JST04_1MM_RA]  38.61,62.74 180 top
J8  Breadboard Headers  [1X08_NO_SILK]  128.02,9.4 0 top
J9  QWIIC_RIGHT_ANGLE  [JST04_1MM_RA]  126.75,62.74 180 top
J10  [1X02_NO_SILK]  143.26,65.28 0 top
J11  USB-C Connector  [USB-C-16P_4LAYER-PADS]  16,108.97 270 top
J12  Breadboard Connector  [1X08_NO_SILK]  17.02,70.87 0 top
J13  Breadboard Headers  [1X08_NO_SILK]  39.88,70.87 0 top
J14  QWIIC_RIGHT_ANGLE  [JST04_1MM_RA]  38.61,124.21 180 top
J15  [1X02_NO_SILK]  55.12,126.75 0 top
J16  USB-C Connector  [USB-C-16P_4LAYER-PADS]  104.14,108.97 270 top
J17  Breadboard Connector  [1X08_NO_SILK]  105.16,70.87 0 top
J18  Breadboard Headers  [1X08_NO_SILK]  128.02,70.87 0 top
J19  QWIIC_RIGHT_ANGLE  [JST04_1MM_RA]  126.75,124.21 180 top
J20  [1X02_NO_SILK]  143.26,126.75 0 top
L1  4.7μH  [INDUCTOR_4X4MM]  49.4,55.63 180 top
L2  4.7μH  [INDUCTOR_4X4MM]  137.54,55.63 180 top
L3  4.7μH  [INDUCTOR_4X4MM]  49.4,117.09 180 top
L4  4.7μH  [INDUCTOR_4X4MM]  137.54,117.09 180 top
LOGO1  SFE_LOGO_NAMEBLANK  [BLANK]  112.27,10.67 0 bottom
LOGO2  OSHW-LOGOM  [OSHW-LOGO-M]  13.21,57.66 0 bottom
LOGO3  SFE_LOGO_FLAME.2_INCH  [SFE_LOGO_FLAME_.2]  52.58,36.07 0 top
LOGO4  QWIIC_LOGO_5MM  [QWIIC_5MM]  38.61,59.69 0 top
LOGO5  OSHW-LOGOM  [OSHW-LOGO-M]  101.35,57.66 0 bottom
LOGO6  SFE_LOGO_FLAME.2_INCH  [SFE_LOGO_FLAME_.2]  140.72,36.07 0 top
LOGO7  QWIIC_LOGO_5MM  [QWIIC_5MM]  126.75,59.69 0 top
LOGO8  SFE_LOGO_NAMEBLANK  [BLANK]  200.41,10.67 0 bottom  (outside the outline)
LOGO9  OSHW-LOGOM  [OSHW-LOGO-M]  13.21,119.13 0 bottom
LOGO10  SFE_LOGO_FLAME.2_INCH  [SFE_LOGO_FLAME_.2]  52.58,97.54 0 top
LOGO11  QWIIC_LOGO_5MM  [QWIIC_5MM]  38.61,121.16 0 top
LOGO12  SFE_LOGO_NAMEBLANK  [BLANK]  112.27,72.14 0 bottom
LOGO13  OSHW-LOGOM  [OSHW-LOGO-M]  101.35,119.13 0 bottom
LOGO14  SFE_LOGO_FLAME.2_INCH  [SFE_LOGO_FLAME_.2]  140.72,97.54 0 top
LOGO15  QWIIC_LOGO_5MM  [QWIIC_5MM]  126.75,121.16 0 top
LOGO16  SFE_LOGO_NAMEBLANK  [BLANK]  200.41,72.14 0 bottom  (outside the outline)
MEAS  JUMPER-COMBO_2_NC_TRACE  [COMBO-JUMPER_2_NC_TRACE]  37.59,43.56 180 bottom
MEAS1  JUMPER-COMBO_2_NC_TRACE  [COMBO-JUMPER_2_NC_TRACE]  125.73,43.56 180 bottom
MEAS2  JUMPER-COMBO_2_NC_TRACE  [COMBO-JUMPER_2_NC_TRACE]  37.59,105.03 180 bottom
MEAS3  JUMPER-COMBO_2_NC_TRACE  [COMBO-JUMPER_2_NC_TRACE]  125.73,105.03 180 bottom
MPWR  JUMPER-SMT_2_NC_TRACE_SILK  [SMT-JUMPER_2_NC_TRACE_SILK]  41.15,55.12 0 bottom
MPWR1  JUMPER-SMT_2_NC_TRACE_SILK  [SMT-JUMPER_2_NC_TRACE_SILK]  129.29,55.12 0 bottom
MPWR2  JUMPER-SMT_2_NC_TRACE_SILK  [SMT-JUMPER_2_NC_TRACE_SILK]  41.15,116.59 0 bottom
MPWR3  JUMPER-SMT_2_NC_TRACE_SILK  [SMT-JUMPER_2_NC_TRACE_SILK]  129.29,116.59 0 bottom
P1  0532610371  [MOLEX_0532610371]  88.14,58.93 0 top
P2  0532610371  [MOLEX_0532610371]  176.28,58.93 0 top
P3  0532610371  [MOLEX_0532610371]  88.14,120.4 0 top
P4  0532610371  [MOLEX_0532610371]  176.28,120.4 0 top
PWR  JUMPER-SMT_2_NC_TRACE_SILK  [SMT-JUMPER_2_NC_TRACE_SILK]  34.8,55.5 0 bottom
PWR1  JUMPER-SMT_2_NC_TRACE_SILK  [SMT-JUMPER_2_NC_TRACE_SILK]  122.94,55.5 0 bottom
PWR2  JUMPER-SMT_2_NC_TRACE_SILK  [SMT-JUMPER_2_NC_TRACE_SILK]  34.8,116.97 0 bottom
PWR3  JUMPER-SMT_2_NC_TRACE_SILK  [SMT-JUMPER_2_NC_TRACE_SILK]  122.94,116.97 0 bottom
Q1  [SOT363_PHILIPS]  38.86,51.18 180 top
Q2  NPN Transistors  [SC70-6]  32.26,47.5 270 top
Q3  20V/4.2A/52mΩ/1.4W  [SOT23-3]  38.86,47.37 180 top
Q4  NPN Transistors  [SC70-6]  120.4,47.5 270 top
Q5  [SOT363_PHILIPS]  127,51.18 180 top
Q6  20V/4.2A/52mΩ/1.4W  [SOT23-3]  127,47.37 180 top
Q7  NPN Transistors  [SC70-6]  32.26,108.97 270 top
Q8  [SOT363_PHILIPS]  38.86,112.65 180 top
Q9  20V/4.2A/52mΩ/1.4W  [SOT23-3]  38.86,108.84 180 top
Q10  NPN Transistors  [SC70-6]  120.4,108.97 270 top
Q11  [SOT363_PHILIPS]  127,112.65 180 top
Q12  20V/4.2A/52mΩ/1.4W  [SOT23-3]  127,108.84 180 top
R1  100k  [0603]  41.4,51.18 90 top
R2  10k  [0603]  32.26,49.78 180 top
R3  10k  [0603]  32.26,44.96 180 top
R4  1M  [0603]  42.67,48.39 180 top
R5  93.1k  [0603]  53.21,50.16 90 top
R6  30.1k  [0603]  54.74,50.16 270 top
R7  100k  [0603]  67.18,60.07 0 top
R8  100k  [0603]  70.48,65.28 270 top
R9  100k  [0603]  67.18,58.55 0 top
R10  100k  [0603]  72.01,65.28 270 top
R11  100k  [0603]  67.18,61.59 0 top
R12  100k  [0603]  73.53,65.28 270 top
R13  2.2k  [0603]  62.74,54.74 0 top
R14  0.012ohm  [0603]  79.76,65.02 180 top
R15  330  [0603]  62.74,60.83 180 top
R16  10k  [0603]  56.39,28.19 270 top
R17  4.7k  [0603]  34.8,54.86 0 top
R18  5.1k  [0603]  14.48,39.88 0 top
R19  5.1k  [0603]  19.56,51.31 270 top
R20  1k  [0603]  81.79,41.15 180 top
R21  20k  [0603]  78.87,41.66 90 top
R22  4.7k  [0603]  41.15,54.86 0 top
R23  100k  [0603]  160.15,65.28 270 top
R24  100k  [0603]  54.1,39.75 180 top
R25  100k  [0603]  155.32,61.59 0 top
R26  2.2k  [0603]  47.5,60.58 0 top
R27  2.2k  [0603]  47.5,64.01 0 top
R28  10k  [0603]  50.04,15.75 180 top
R29  100k  [0603]  161.67,65.28 270 top
R30  2.2k  [0603]  150.88,54.74 0 top
R31  0.012ohm  [0603]  167.89,65.02 180 top
R32  0.012ohm  [0603]  79.76,57.02 0 top
R33  0.012ohm  [0603]  79.76,58.67 0 top
R34  0.012ohm  [0603]  79.76,63.5 0 top
R35  330  [0603]  150.88,60.83 180 top
R36  5.1k  [0603]  102.62,39.88 0 top
R37  5.1k  [0603]  107.7,51.31 270 top
R38  100k  [0603]  155.32,60.07 0 top
R39  100k  [0603]  158.62,65.28 270 top
R40  100k  [0603]  155.32,58.55 0 top
R41  10k  [0603]  120.4,49.78 180 top
R42  10k  [0603]  120.4,44.96 180 top
R43  10k  [0603]  144.53,28.19 270 top
R44  100k  [0603]  142.24,39.75 180 top
R45  10k  [0603]  138.18,15.75 180 top
R46  0.012ohm  [0603]  167.89,57.02 0 top
R47  0.012ohm  [0603]  167.89,58.67 0 top
R48  0.012ohm  [0603]  167.89,63.5 0 top
R49  4.7k  [0603]  122.94,54.86 0 top
R50  2.2k  [0603]  135.64,60.58 0 top
R51  2.2k  [0603]  135.64,64.01 0 top
R52  100k  [0603]  129.54,51.18 90 top
R53  1M  [0603]  130.81,48.39 180 top
R54  93.1k  [0603]  141.35,50.16 90 top
R55  30.1k  [0603]  142.88,50.16 270 top
R56  4.7k  [0603]  129.29,54.86 0 top
R57  1k  [0603]  169.93,41.15 180 top
R58  20k  [0603]  167,41.66 90 top
R59  100k  [0603]  72.01,126.75 270 top
R60  100k  [0603]  67.18,123.06 0 top
R61  100k  [0603]  73.53,126.75 270 top
R62  2.2k  [0603]  62.74,116.2 0 top
R63  0.012ohm  [0603]  79.76,126.49 180 top
R64  330  [0603]  62.74,122.3 180 top
R65  5.1k  [0603]  14.48,101.35 0 top
R66  5.1k  [0603]  19.56,112.78 270 top
R67  100k  [0603]  67.18,121.54 0 top
R68  100k  [0603]  70.48,126.75 270 top
R69  100k  [0603]  67.18,120.02 0 top
R70  10k  [0603]  32.26,111.25 180 top
R71  10k  [0603]  32.26,106.43 180 top
R72  10k  [0603]  56.39,89.66 270 top
R73  100k  [0603]  54.1,101.22 180 top
R74  10k  [0603]  50.04,77.22 180 top
R75  0.012ohm  [0603]  79.76,118.49 0 top
R76  0.012ohm  [0603]  79.76,120.14 0 top
R77  0.012ohm  [0603]  79.76,124.97 0 top
R78  4.7k  [0603]  34.8,116.33 0 top
R79  2.2k  [0603]  47.5,122.05 0 top
R80  2.2k  [0603]  47.5,125.48 0 top
R81  100k  [0603]  41.4,112.65 90 top
R82  1M  [0603]  42.67,109.86 180 top
R83  93.1k  [0603]  53.21,111.63 90 top
R84  30.1k  [0603]  54.74,111.63 270 top
R85  4.7k  [0603]  41.15,116.33 0 top
R86  1k  [0603]  81.79,102.62 180 top
R87  20k  [0603]  78.87,103.12 90 top
R88  100k  [0603]  160.15,126.75 270 top
R89  100k  [0603]  155.32,123.06 0 top
R90  100k  [0603]  161.67,126.75 270 top
R91  2.2k  [0603]  150.88,116.2 0 top
R92  0.012ohm  [0603]  167.89,126.49 180 top
R93  330  [0603]  150.88,122.3 180 top
R94  5.1k  [0603]  102.62,101.35 0 top
R95  5.1k  [0603]  107.7,112.78 270 top
R96  100k  [0603]  155.32,121.54 0 top
R97  100k  [0603]  158.62,126.75 270 top
R98  100k  [0603]  155.32,120.02 0 top
R99  10k  [0603]  120.4,111.25 180 top
R100  10k  [0603]  120.4,106.43 180 top
R101  10k  [0603]  144.53,89.66 270 top
R102  100k  [0603]  142.24,101.22 180 top
R103  10k  [0603]  138.18,77.22 180 top
R104  0.012ohm  [0603]  167.89,118.49 0 top
R105  0.012ohm  [0603]  167.89,120.14 0 top
R106  0.012ohm  [0603]  167.89,124.97 0 top
R107  4.7k  [0603]  122.94,116.33 0 top
R108  2.2k  [0603]  135.64,122.05 0 top
R109  2.2k  [0603]  135.64,125.48 0 top
R110  100k  [0603]  129.54,112.65 90 top
R111  1M  [0603]  130.81,109.86 180 top
R112  93.1k  [0603]  141.35,111.63 90 top
R113  30.1k  [0603]  142.88,111.63 270 top
R114  4.7k  [0603]  129.29,116.33 0 top
R115  1k  [0603]  169.93,102.62 180 top
R116  20k  [0603]  167,103.12 90 top
S1  [TACTILE_SWITCH_SMD_5.2MM]  41.15,27.18 0 top
S2  [TACTILE_SWITCH_SMD_5.2MM]  51.31,27.18 0 top
S3  [TACTILE_SWITCH_SMD_5.2MM]  41.15,19.56 0 top
S4  [TACTILE_SWITCH_SMD_5.2MM]  51.31,19.56 0 top
S5  [TACTILE_SWITCH_SMD_5.2MM]  129.29,19.56 0 top
S6  [TACTILE_SWITCH_SMD_5.2MM]  139.45,19.56 0 top
S7  [TACTILE_SWITCH_SMD_5.2MM]  129.29,27.18 0 top
S8  [TACTILE_SWITCH_SMD_5.2MM]  139.45,27.18 0 top
S9  [TACTILE_SWITCH_SMD_5.2MM]  41.15,81.03 0 top
S10  [TACTILE_SWITCH_SMD_5.2MM]  51.31,81.03 0 top
S11  [TACTILE_SWITCH_SMD_5.2MM]  41.15,88.65 0 top
S12  [TACTILE_SWITCH_SMD_5.2MM]  51.31,88.65 0 top
S13  [TACTILE_SWITCH_SMD_5.2MM]  129.29,81.03 0 top
S14  [TACTILE_SWITCH_SMD_5.2MM]  139.45,81.03 0 top
S15  [TACTILE_SWITCH_SMD_5.2MM]  129.29,88.65 0 top
S16  [TACTILE_SWITCH_SMD_5.2MM]  139.45,88.65 0 top
SHLD  JUMPER-SMT_2_NC_TRACE_SILK  [SMT-JUMPER_2_NC_TRACE_SILK]  12.83,42.67 90 bottom
SHLD1  JUMPER-SMT_2_NC_TRACE_SILK  [SMT-JUMPER_2_NC_TRACE_SILK]  100.96,42.67 90 bottom
SHLD2  JUMPER-SMT_2_NC_TRACE_SILK  [SMT-JUMPER_2_NC_TRACE_SILK]  12.83,104.14 90 bottom
SHLD3  JUMPER-SMT_2_NC_TRACE_SILK  [SMT-JUMPER_2_NC_TRACE_SILK]  100.96,104.14 90 bottom
STAT  WS2812_2020  [WS2812-2020]  41.02,34.8 0 top
STAT1  WS2812_2020  [WS2812-2020]  129.16,34.8 0 top
STAT2  WS2812_2020  [WS2812-2020]  41.02,96.27 0 top
STAT3  WS2812_2020  [WS2812-2020]  129.16,96.27 0 top
TP1  TEST-POINT3X4  [PAD.03X.04]  53.85,17.02 0 bottom
TP2  TEST-POINT3X4  [PAD.03X.04]  46.23,32.26 90 bottom
TP3  TEST-POINT3X4  [PAD.03X.04]  29.72,38.61 0 bottom
TP4  TEST-POINT3X4  [PAD.03X.04]  28.45,34.8 0 bottom
TP5  TEST-POINT3X4  [PAD.03X.04]  28.45,41.15 0 bottom
TP6  TEST-POINT3X4  [PAD.03X.04]  17.02,33.53 0 bottom
TP7  TEST-POINT3X4  [PAD.03X.04]  25.91,38.61 0 bottom
TP8  TEST-POINT3X4  [PAD.03X.04]  30.99,34.8 0 bottom
TP9  TEST-POINT3X4  [PAD.03X.04]  66.55,39.88 270 bottom
TP10  TEST-POINT3X4  [PAD.03X.04]  67.82,53.85 0 bottom
TP11  TEST-POINT3X4  [PAD.03X.04]  22.1,22.1 0 bottom
TP12  TEST-POINT3X4  [PAD.03X.04]  25.91,34.8 0 bottom
TP13  TEST-POINT3X4  [PAD.03X.04]  76.71,55.12 0 bottom
TP14  TEST-POINT3X4  [PAD.03X.04]  67.82,44.96 0 bottom
TP15  TEST-POINT3X4  [PAD.03X.04]  84.33,51.31 0 bottom
TP16  TEST-POINT3X4  [PAD.03X.04]  134.37,32.26 90 bottom
TP17  TEST-POINT3X4  [PAD.03X.04]  117.86,38.61 0 bottom
TP18  TEST-POINT3X4  [PAD.03X.04]  116.59,34.8 0 bottom
TP19  TEST-POINT3X4  [PAD.03X.04]  116.59,41.15 0 bottom
TP20  TEST-POINT3X4  [PAD.03X.04]  105.16,33.53 0 bottom
TP21  TEST-POINT3X4  [PAD.03X.04]  114.05,38.61 0 bottom
TP22  TEST-POINT3X4  [PAD.03X.04]  119.13,34.8 0 bottom
TP23  TEST-POINT3X4  [PAD.03X.04]  154.69,39.88 270 bottom
TP24  TEST-POINT3X4  [PAD.03X.04]  155.96,53.85 0 bottom
TP25  TEST-POINT3X4  [PAD.03X.04]  110.24,22.1 0 bottom
TP26  TEST-POINT3X4  [PAD.03X.04]  114.05,34.8 0 bottom
TP27  TEST-POINT3X4  [PAD.03X.04]  141.99,17.02 0 bottom
TP28  TEST-POINT3X4  [PAD.03X.04]  164.85,55.12 0 bottom
TP29  TEST-POINT3X4  [PAD.03X.04]  155.96,44.96 0 bottom
TP30  TEST-POINT3X4  [PAD.03X.04]  172.47,51.31 0 bottom
TP31  TEST-POINT3X4  [PAD.03X.04]  46.23,93.73 90 bottom
TP32  TEST-POINT3X4  [PAD.03X.04]  29.72,100.08 0 bottom
TP33  TEST-POINT3X4  [PAD.03X.04]  28.45,96.27 0 bottom
TP34  TEST-POINT3X4  [PAD.03X.04]  28.45,102.62 0 bottom
TP35  TEST-POINT3X4  [PAD.03X.04]  17.02,95 0 bottom
TP36  TEST-POINT3X4  [PAD.03X.04]  25.91,100.08 0 bottom
TP37  TEST-POINT3X4  [PAD.03X.04]  30.99,96.27 0 bottom
TP38  TEST-POINT3X4  [PAD.03X.04]  66.55,101.35 270 bottom
TP39  TEST-POINT3X4  [PAD.03X.04]  67.82,115.32 0 bottom
TP40  TEST-POINT3X4  [PAD.03X.04]  22.1,83.57 0 bottom
TP41  TEST-POINT3X4  [PAD.03X.04]  25.91,96.27 0 bottom
TP42  TEST-POINT3X4  [PAD.03X.04]  53.85,78.49 0 bottom
TP43  TEST-POINT3X4  [PAD.03X.04]  76.71,116.59 0 bottom
TP44  TEST-POINT3X4  [PAD.03X.04]  67.82,106.43 0 bottom
TP45  TEST-POINT3X4  [PAD.03X.04]  84.33,112.78 0 bottom
TP46  TEST-POINT3X4  [PAD.03X.04]  134.37,93.73 90 bottom
TP47  TEST-POINT3X4  [PAD.03X.04]  117.86,100.08 0 bottom
TP48  TEST-POINT3X4  [PAD.03X.04]  116.59,96.27 0 bottom
TP49  TEST-POINT3X4  [PAD.03X.04]  116.59,102.62 0 bottom
TP50  TEST-POINT3X4  [PAD.03X.04]  105.16,95 0 bottom
TP51  TEST-POINT3X4  [PAD.03X.04]  114.05,100.08 0 bottom
TP52  TEST-POINT3X4  [PAD.03X.04]  119.13,96.27 0 bottom
TP53  TEST-POINT3X4  [PAD.03X.04]  154.69,101.35 270 bottom
TP54  TEST-POINT3X4  [PAD.03X.04]  155.96,115.32 0 bottom
TP55  TEST-POINT3X4  [PAD.03X.04]  110.24,83.57 0 bottom
TP56  TEST-POINT3X4  [PAD.03X.04]  114.05,96.27 0 bottom
TP57  TEST-POINT3X4  [PAD.03X.04]  141.99,78.49 0 bottom
TP58  TEST-POINT3X4  [PAD.03X.04]  164.85,116.59 0 bottom
TP59  TEST-POINT3X4  [PAD.03X.04]  155.96,106.43 0 bottom
TP60  TEST-POINT3X4  [PAD.03X.04]  172.47,112.78 0 bottom
U1  TMC6300  [QFN-20]  72.9,60.2 270 top
U2  3.3V  [SOT23-5]  54.1,43.56 0 top
U3  ESP-WROOM-3232D  [ESP-WROOM-32D]  23.37,27.18 180 top
U4  CH340C  [SO016]  26.54,46.23 270 top
U5  ESD Diode  [SOT-23-6]  19.56,47.5 90 top
U6  AP63357  [V-DFN3020-13]  48.77,50.04 0 top
U7  INA240A1  [D8_TEX]  72.9,50.04 0 top
U8  TMAG5273  [SOT23-6_DBV_TEX]  77.65,23.55 90 top
U9  OPA344  [SOT23-5]  81.79,44.96 0 top
U10  INA240A1  [D8_TEX]  81.79,50.04 0 top
U11  INA240A1  [D8_TEX]  72.9,43.69 0 top
U12  TMC6300  [QFN-20]  161.04,60.2 270 top
U13  ESP-WROOM-3232D  [ESP-WROOM-32D]  111.51,27.18 180 top
U14  CH340C  [SO016]  114.68,46.23 270 top
U15  ESD Diode  [SOT-23-6]  107.7,47.5 90 top
U16  TMAG5273  [SOT23-6_DBV_TEX]  165.79,23.55 90 top
U17  3.3V  [SOT23-5]  142.24,43.56 0 top
U18  AP63357  [V-DFN3020-13]  136.91,50.04 0 top
U19  INA240A1  [D8_TEX]  161.04,50.04 0 top
U20  INA240A1  [D8_TEX]  169.93,50.04 0 top
U21  INA240A1  [D8_TEX]  161.04,43.69 0 top
U22  OPA344  [SOT23-5]  169.93,44.96 0 top
U23  TMC6300  [QFN-20]  72.9,121.67 270 top
U24  ESP-WROOM-3232D  [ESP-WROOM-32D]  23.37,88.65 180 top
U25  CH340C  [SO016]  26.54,107.7 270 top
U26  ESD Diode  [SOT-23-6]  19.56,108.97 90 top
U27  TMAG5273  [SOT23-6_DBV_TEX]  77.65,85.02 90 top
U28  3.3V  [SOT23-5]  54.1,105.03 0 top
U29  AP63357  [V-DFN3020-13]  48.77,111.51 0 top
U30  INA240A1  [D8_TEX]  72.9,111.51 0 top
U31  INA240A1  [D8_TEX]  81.79,111.51 0 top
U32  INA240A1  [D8_TEX]  72.9,105.16 0 top
U33  OPA344  [SOT23-5]  81.79,106.43 0 top
U34  TMC6300  [QFN-20]  161.04,121.67 270 top
U35  ESP-WROOM-3232D  [ESP-WROOM-32D]  111.51,88.65 180 top
U36  CH340C  [SO016]  114.68,107.7 270 top
U37  ESD Diode  [SOT-23-6]  107.7,108.97 90 top
U38  TMAG5273  [SOT23-6_DBV_TEX]  165.79,85.02 90 top
U39  3.3V  [SOT23-5]  142.24,105.03 0 top
U40  AP63357  [V-DFN3020-13]  136.91,111.51 0 top
U41  INA240A1  [D8_TEX]  161.04,111.51 0 top
U42  INA240A1  [D8_TEX]  169.93,111.51 0 top
U43  INA240A1  [D8_TEX]  161.04,105.16 0 top
U44  OPA344  [SOT23-5]  169.93,106.43 0 top
U$1  [ORDERING_INSTRUCTIONS]  112.27,61.47 0 top
U$2  [OT-EM3215]  77.98,23.37 330 top
U$3  [1436]  41.15,22.73 0 top
U$4  [STAT1630063003522]  41.02,36.58 0 top
U$5  [RST1630063003525]  51.31,30.48 0 top
U$6  [#14#AUX1#36]  55.12,13.72 90 bottom
U$7  [#12#31]  34.8,11.3 90 top
U$8  [#DIAG#15]  66.17,64.26 0 bottom
U$9  [#14#36]  55.12,11.3 90 top
U$10  [##STBY##16]  65.41,60.32 0 bottom
U$11  [BOOT21630063003532]  41.27,30.48 0 top
U$12  [PWR21630063003533]  34.8,57.66 0 top
U$13  [#MTR_EN#131458]  39.88,13.84 90 bottom
U$14  [#GND#32]  17.02,12.19 90 top
U$15  [#GND#32]  17.02,12.19 90 bottom
U$16  [#2#LED#21630063003534]  52.58,12.95 90 bottom
U$17  [#4#INT_MAG#21630063003534]  50.04,15.11 90 bottom
U$18  [#22#33]  19.56,11.56 90 top
U$19  [#21#33]  22.1,11.43 90 top
U$20  [#MPWR#131468]  41.27,56.9 0 bottom
U$21  [#27#33]  24.64,11.56 90 top
U$22  [#15#33]  32.26,11.3 90 top
U$23  [#I2C#630063003467]  50.29,64.9 0 bottom
U$24  [#SHLD#630063003467]  12.7,40.77 0 bottom
U$25  [##INT#630063003473]  56.9,21.84 0 bottom
U$26  [#32#CURR_SENSE#10]  47.5,16.76 90 bottom
U$27  [#PWR#33]  34.8,57.28 0 bottom
U$28  [#GND#17]  55.12,62.48 90 top
U$29  [#RESET#34]  44.96,12.95 90 top
U$30  [#RESET#34]  44.96,12.95 90 bottom
U$31  [#0#33]  42.42,11.05 90 top
U$32  [#0#QWR#36]  42.42,13.34 90 bottom
U$33  [#32#33]  47.5,11.43 90 top
U$34  [#4#33]  50.04,11.05 90 top
U$35  [#12#GPIO1#4]  34.8,13.84 90 bottom
U$36  [#2#33]  52.58,11.05 90 top
U$37  [#15#GPIO4#13]  32.26,13.97 90 bottom
U$38  [#13#36]  57.66,11.43 90 top
U$39  [131437]  51.31,22.73 0 top
U$40  [#26#A0#30]  27.18,12.95 90 bottom
U$41  [#25#A1#30]  29.72,12.83 90 bottom
U$42  [#A1#30]  29.72,11.56 90 top
U$43  [#BYP#131439]  42.67,47.88 0 bottom
U$44  [SPARKFUN_IOT131442]  23.37,62.74 0 top
U$45  [SFE_LOGO_NAME_FLAME_.2]  46.23,36.07 0 bottom
U$46  [BRUSHLESS131445]  23.37,60.2 0 top
U$47  [MOTOR_DRIVER131446]  23.37,57.66 0 top
U$48  [#MEAS#131453]  37.72,41.78 0 top
U$49  [MPWR131449]  41.15,57.66 0 top
U$50  [#MEAS#131453]  37.72,45.21 0 bottom
U$51  [#MTR_EN#131460]  39.88,13.46 90 top
U$52  [#13#AUX2#14]  57.66,13.97 90 bottom
U$53  [#STBY#131470]  62.86,57.53 0 top
U$54  [#27#GPIO2#27]  24.64,14.1 90 bottom
U$55  [IOT_BRUSHLESS131454]  77.98,37.34 0 bottom
U$56  [#21#SDA#29]  22.1,13.46 90 bottom
U$57  [DIAG131469]  62.74,63.5 0 top
U$58  [#3V3#18]  57.66,62.48 90 top
U$59  [ORDERING_INSTRUCTIONS]  200.41,61.47 0 top  (outside the outline)
U$60  [#I2C#630063003467]  138.43,64.9 0 bottom
U$61  [#SHLD#630063003467]  100.84,40.77 0 bottom
U$62  [MOTOR_DRIVER630063003515]  77.98,34.8 0 bottom
U$63  [#22#SCL#30]  19.56,13.46 90 bottom
U$64  [#A0#30]  27.18,11.68 90 top
U$65  [##INT#630063003473]  145.03,21.84 0 bottom
U$66  [SFE_LOGO_NAME_FLAME_.2]  134.37,36.07 0 bottom
U$67  [MOTOR_DRIVER630063003515]  166.12,34.8 0 bottom
U$68  [OT-EM3215]  166.12,23.37 330 top
U$69  [STAT1630063003522]  129.16,36.58 0 top
U$70  [RST1630063003525]  139.45,30.48 0 top
U$71  [BOOT21630063003532]  129.41,30.48 0 top
U$72  [PWR21630063003533]  122.94,57.66 0 top
U$73  [#2#LED#21630063003534]  140.72,12.95 90 bottom
U$74  [#4#INT_MAG#21630063003534]  138.18,15.11 90 bottom
U$75  [#32#CURR_SENSE#10]  135.64,16.76 90 bottom
U$76  [#PWR#33]  122.94,57.28 0 bottom
U$77  [#RESET#34]  133.1,12.95 90 top
U$78  [#RESET#34]  133.1,12.95 90 bottom
U$79  [#0#QWR#36]  130.56,13.34 90 bottom
U$80  [#12#GPIO1#4]  122.94,13.84 90 bottom
U$81  [#15#GPIO4#13]  120.4,13.97 90 bottom
U$82  [#27#GPIO2#27]  112.78,14.1 90 bottom
U$83  [#21#SDA#29]  110.24,13.46 90 bottom
U$84  [#22#SCL#30]  107.7,13.46 90 bottom
U$85  [#A0#30]  115.32,11.68 90 top
U$86  [#26#A0#30]  115.32,12.95 90 bottom
U$87  [#25#A1#30]  117.86,12.83 90 bottom
U$88  [#A1#30]  117.86,11.56 90 top
U$89  [#12#31]  122.94,11.3 90 top
U$90  [#GND#32]  105.16,12.19 90 top
U$91  [#GND#32]  105.16,12.19 90 bottom
U$92  [#22#33]  107.7,11.56 90 top
U$93  [#21#33]  110.24,11.43 90 top
U$94  [#27#33]  112.78,11.56 90 top
U$95  [#15#33]  120.4,11.3 90 top
U$96  [#0#33]  130.56,11.05 90 top
U$97  [#32#33]  135.64,11.43 90 top
U$98  [#4#33]  138.18,11.05 90 top
U$99  [#2#33]  140.72,11.05 90 top
U$100  [#14#AUX1#36]  143.26,13.72 90 bottom
U$101  [#14#36]  143.26,11.3 90 top
U$102  [#13#36]  145.8,11.43 90 top
U$103  [1436]  129.29,22.73 0 top
U$104  [131437]  139.45,22.73 0 top
U$105  [#BYP#131439]  130.81,47.88 0 bottom
U$106  [SPARKFUN_IOT131442]  111.51,62.74 0 top
U$107  [BRUSHLESS131445]  111.51,60.2 0 top
U$108  [MOTOR_DRIVER131446]  111.51,57.66 0 top
U$109  [MPWR131449]  129.29,57.66 0 top
U$110  [#MEAS#131453]  125.86,45.21 0 bottom
U$111  [#MEAS#131453]  125.86,41.78 0 top
U$112  [IOT_BRUSHLESS131454]  166.12,37.34 0 bottom
U$113  [#MTR_EN#131458]  128.02,13.84 90 bottom
U$114  [#MTR_EN#131460]  128.02,13.46 90 top
U$115  [#MPWR#131468]  129.41,56.9 0 bottom
U$116  [DIAG131469]  150.88,63.5 0 top
U$117  [#STBY#131470]  151,57.53 0 top
U$118  [#13#AUX2#14]  145.8,13.97 90 bottom
U$119  [#DIAG#15]  154.31,64.26 0 bottom
U$120  [##STBY##16]  153.54,60.32 0 bottom
U$121  [#GND#17]  143.26,62.48 90 top
U$122  [#3V3#18]  145.8,62.48 90 top
U$123  [ORDERING_INSTRUCTIONS]  112.27,122.94 0 top
U$124  [#I2C#630063003467]  50.29,126.37 0 bottom
U$125  [#SHLD#630063003467]  12.7,102.23 0 bottom
U$126  [##INT#630063003473]  56.9,83.31 0 bottom
U$127  [SFE_LOGO_NAME_FLAME_.2]  46.23,97.54 0 bottom
U$128  [MOTOR_DRIVER630063003515]  77.98,96.27 0 bottom
U$129  [OT-EM3215]  77.98,84.84 330 top
U$130  [STAT1630063003522]  41.02,98.04 0 top
U$131  [RST1630063003525]  51.31,91.95 0 top
U$132  [BOOT21630063003532]  41.27,91.95 0 top
U$133  [PWR21630063003533]  34.8,119.13 0 top
U$134  [#2#LED#21630063003534]  52.58,74.42 90 bottom
U$135  [#4#INT_MAG#21630063003534]  50.04,76.58 90 bottom
U$136  [#32#CURR_SENSE#10]  47.5,78.23 90 bottom
U$137  [#PWR#33]  34.8,118.75 0 bottom
U$138  [#RESET#34]  44.96,74.42 90 top
U$139  [#RESET#34]  44.96,74.42 90 bottom
U$140  [#0#QWR#36]  42.42,74.8 90 bottom
U$141  [#12#GPIO1#4]  34.8,75.31 90 bottom
U$142  [#15#GPIO4#13]  32.26,75.44 90 bottom
U$143  [#27#GPIO2#27]  24.64,75.56 90 bottom
U$144  [#21#SDA#29]  22.1,74.93 90 bottom
U$145  [#22#SCL#30]  19.56,74.93 90 bottom
U$146  [#A0#30]  27.18,73.15 90 top
U$147  [#26#A0#30]  27.18,74.42 90 bottom
U$148  [#25#A1#30]  29.72,74.3 90 bottom
U$149  [#A1#30]  29.72,73.03 90 top
U$150  [#12#31]  34.8,72.77 90 top
U$151  [#GND#32]  17.02,73.66 90 top
U$152  [#GND#32]  17.02,73.66 90 bottom
U$153  [#22#33]  19.56,73.03 90 top
U$154  [#21#33]  22.1,72.9 90 top
U$155  [#27#33]  24.64,73.03 90 top
U$156  [#15#33]  32.26,72.77 90 top
U$157  [#0#33]  42.42,72.52 90 top
U$158  [#32#33]  47.5,72.9 90 top
U$159  [#4#33]  50.04,72.52 90 top
U$160  [#2#33]  52.58,72.52 90 top
U$161  [#14#AUX1#36]  55.12,75.18 90 bottom
U$162  [#14#36]  55.12,72.77 90 top
U$163  [#13#36]  57.66,72.9 90 top
U$164  [1436]  41.15,84.2 0 top
U$165  [131437]  51.31,84.2 0 top
U$166  [#BYP#131439]  42.67,109.35 0 bottom
U$167  [SPARKFUN_IOT131442]  23.37,124.21 0 top
U$168  [BRUSHLESS131445]  23.37,121.67 0 top
U$169  [MOTOR_DRIVER131446]  23.37,119.13 0 top
U$170  [MPWR131449]  41.15,119.13 0 top
U$171  [#MEAS#131453]  37.72,106.68 0 bottom
U$172  [#MEAS#131453]  37.72,103.25 0 top
U$173  [IOT_BRUSHLESS131454]  77.98,98.81 0 bottom
U$174  [#MTR_EN#131458]  39.88,75.31 90 bottom
U$175  [#MTR_EN#131460]  39.88,74.93 90 top
U$176  [#MPWR#131468]  41.27,118.36 0 bottom
U$177  [DIAG131469]  62.74,124.97 0 top
U$178  [#STBY#131470]  62.86,119 0 top
U$179  [#13#AUX2#14]  57.66,75.44 90 bottom
U$180  [#DIAG#15]  66.17,125.73 0 bottom
U$181  [##STBY##16]  65.41,121.79 0 bottom
U$182  [#GND#17]  55.12,123.95 90 top
U$183  [#3V3#18]  57.66,123.95 90 top
U$184  [ORDERING_INSTRUCTIONS]  200.41,122.94 0 top  (outside the outline)
U$185  [#I2C#630063003467]  138.43,126.37 0 bottom
U$186  [#SHLD#630063003467]  100.84,102.23 0 bottom
U$187  [##INT#630063003473]  145.03,83.31 0 bottom
U$188  [SFE_LOGO_NAME_FLAME_.2]  134.37,97.54 0 bottom
U$189  [MOTOR_DRIVER630063003515]  166.12,96.27 0 bottom
U$190  [OT-EM3215]  166.12,84.84 330 top
U$191  [STAT1630063003522]  129.16,98.04 0 top
U$192  [RST1630063003525]  139.45,91.95 0 top
U$193  [BOOT21630063003532]  129.41,91.95 0 top
U$194  [PWR21630063003533]  122.94,119.13 0 top
U$195  [#2#LED#21630063003534]  140.72,74.42 90 bottom
U$196  [#4#INT_MAG#21630063003534]  138.18,76.58 90 bottom
U$197  [#32#CURR_SENSE#10]  135.64,78.23 90 bottom
U$198  [#PWR#33]  122.94,118.75 0 bottom
U$199  [#RESET#34]  133.1,74.42 90 top
U$200  [#RESET#34]  133.1,74.42 90 bottom
U$201  [#0#QWR#36]  130.56,74.8 90 bottom
U$202  [#12#GPIO1#4]  122.94,75.31 90 bottom
U$203  [#15#GPIO4#13]  120.4,75.44 90 bottom
U$204  [#27#GPIO2#27]  112.78,75.56 90 bottom
U$205  [#21#SDA#29]  110.24,74.93 90 bottom
U$206  [#22#SCL#30]  107.7,74.93 90 bottom
U$207  [#A0#30]  115.32,73.15 90 top
U$208  [#26#A0#30]  115.32,74.42 90 bottom
U$209  [#25#A1#30]  117.86,74.3 90 bottom
U$210  [#A1#30]  117.86,73.03 90 top
U$211  [#12#31]  122.94,72.77 90 top
U$212  [#GND#32]  105.16,73.66 90 top
U$213  [#GND#32]  105.16,73.66 90 bottom
U$214  [#22#33]  107.7,73.03 90 top
U$215  [#21#33]  110.24,72.9 90 top
U$216  [#27#33]  112.78,73.03 90 top
U$217  [#15#33]  120.4,72.77 90 top
U$218  [#0#33]  130.56,72.52 90 top
U$219  [#32#33]  135.64,72.9 90 top
U$220  [#4#33]  138.18,72.52 90 top
U$221  [#2#33]  140.72,72.52 90 top
U$222  [#14#AUX1#36]  143.26,75.18 90 bottom
U$223  [#14#36]  143.26,72.77 90 top
U$224  [#13#36]  145.8,72.9 90 top
U$225  [1436]  129.29,84.2 0 top
U$226  [131437]  139.45,84.2 0 top
U$227  [#BYP#131439]  130.81,109.35 0 bottom
U$228  [SPARKFUN_IOT131442]  111.51,124.21 0 top
U$229  [BRUSHLESS131445]  111.51,121.67 0 top
U$230  [MOTOR_DRIVER131446]  111.51,119.13 0 top
U$231  [MPWR131449]  129.29,119.13 0 top
U$232  [#MEAS#131453]  125.86,106.68 0 bottom
U$233  [#MEAS#131453]  125.86,103.25 0 top
U$234  [IOT_BRUSHLESS131454]  166.12,98.81 0 bottom
U$235  [#MTR_EN#131458]  128.02,75.31 90 bottom
U$236  [#MTR_EN#131460]  128.02,74.93 90 top
U$237  [#MPWR#131468]  129.41,118.36 0 bottom
U$238  [DIAG131469]  150.88,124.97 0 top
U$239  [#STBY#131470]  151,119 0 top
U$240  [#13#AUX2#14]  145.8,75.44 90 bottom
U$241  [#DIAG#15]  154.31,125.73 0 bottom
U$242  [##STBY##16]  153.54,121.79 0 bottom
U$243  [#GND#17]  143.26,123.95 90 top
U$244  [#3V3#18]  145.8,123.95 90 top

## Library data of the parts
!STBY !STBY1-!STBY3 = SparkFun-Jumpers; SPICEPREFIX: B
BYP BYP1-BYP3 DIAG DIAG1-DIAG3 I2C I2C1-I2C3 INT INT1-INT3 MEAS MEAS1-MEAS3 MPWR MPWR1-MPWR3 PWR PWR1-PWR3 SHLD SHLD1-SHLD3 = SparkFun-Jumpers
C1 C2 C4 C8 C19 C27 C29-C31 C37 C53 C55-C57 C63 C79 C81-C83 C89 = SparkFun-Capacitors; PROD_ID: CAP-16503
C3 C15 C17 C24-C26 C34 C45 C49-C52 C60 C71 C75-C78 C86 C97 C101-C104 = SparkFun-Capacitors; PROD_ID: CAP-08604
C5 C39 C65 C91 = SparkFun-Capacitors; PROD_ID: CAP-00867
C6 C11 C12 C40-C42 C66-C68 C92-C94 = SparkFun-Capacitors; PROD_ID: CAP-00810
C7 C38 C64 C90 = SparkFun-Capacitors; PROD_ID: CAP-13210
C9 C32 C58 C84 = SparkFun-Capacitors; PROD_ID: CAP-07888
C10 C33 C59 C85 = SparkFun-Capacitors; PROD_ID: CAP-13930
C13 C14 C18 C28 C43 C44 C54 C69 C70 C80 C95 C96 = SparkFun-Capacitors; PROD_ID: CAP-11015
C16 C46 C72 C98 = SparkFun-Capacitors; PROD_ID: CAP-10142
C20-C22 C35 C47 C48 C61 C73 C74 C87 C99 C100 = SparkFun-Capacitors; PROD_ID: CAP-14464
C23 C36 C62 C88 = SparkFun-Capacitors; PROD_ID: CAP-15083
D1 D2 D9 D10 D14 D15 D19 D20 = SparkFun-LED; PROD_ID: DIO-17976
D3 D5 D11 D16 = SparkFun-LED; PROD_ID: DIO-00821
D4 D8 D13 D18 = SparkFun-LED; PROD_ID: DIO-08575
D6 D7 D12 D17 = SparkFun-DiscreteSemi; PROD_ID: DIO-11284
E$1-E$4 FD1-FD16 LOGO1-LOGO16 U$1 U$45 U$59 U$66 U$123 U$127 U$184 U$188 = SparkFun-Aesthetics
E$5 E$6 = SparkFun-Retired
F1-F4 = SparkFun-Fuses; PROD_ID: RES-14313
H1-H16 = SparkFun-Hardware
J1 J3 J11 J16 = SparkFun-Connectors; PROD_ID: CONN-14122
J2 J4-J6 J8 J10 J12 J13 J15 J17 J18 J20 TP1-TP60 = SparkFun-Connectors
J7 J9 J14 J19 = SparkFun-Connectors; PROD_ID: CONN-13694
L1-L4 = SparkFun-Coils; PROD_ID: NDUC-15245
P1-P4 = 0532610371; DESCRIPTION: Picoblade Connector, 3 Circuit Single Row, Right Angle Surface Mount SMT PCB; PROD_ID: CONN-16168
Q1 Q5 Q8 Q11 = SparkFun-DiscreteSemi; PROD_ID: TRANS-14386
Q2 Q4 Q7 Q10 = SparkFun-DiscreteSemi; PROD_ID: TRANS-13337
Q3 Q6 Q9 Q12 = SparkFun-DiscreteSemi; PROD_ID: TRANS-14388
R1 R7-R12 R23-R25 R29 R38-R40 R44 R52 R59-R61 R67-R69 R73 R81 R88-R90 R96-R98 R102 R110 = SparkFun-Resistors; PROD_ID: RES-07828
R2 R3 R16 R28 R41-R43 R45 R70-R72 R74 R99-R101 R103 = SparkFun-Resistors; PROD_ID: RES-00824
R4 R53 R82 R111 = SparkFun-Resistors; PROD_ID: RES-07868
R5 R54 R83 R112 = SparkFun-Resistors; PROD_ID: RES-14393
R6 R55 R84 R113 = SparkFun-Resistors; PROD_ID: RES-14690
R13 R26 R27 R30 R50 R51 R62 R79 R80 R91 R108 R109 = SparkFun-Resistors; PROD_ID: RES-08272
R14 R31-R34 R46-R48 R63 R75-R77 R92 R104-R106 = SparkFun-Resistors; PROD_ID: RES-14691
R15 R35 R64 R93 = SparkFun-Resistors; PROD_ID: RES-00818
R17 R22 R49 R56 R78 R85 R107 R114 = SparkFun-Resistors; PROD_ID: RES-07857
R18 R19 R36 R37 R65 R66 R94 R95 = SparkFun-Resistors; PROD_ID: RES-12083
R20 R57 R86 R115 = SparkFun-Resistors; PROD_ID: RES-07856
R21 R58 R87 R116 = SparkFun-Resistors; PROD_ID: RES-09383
S1-S16 = SparkFun-Switches; PROD_ID: SWCH-14139
STAT STAT1-STAT3 = SparkFun-LED; PROD_ID: DIO-15591
U1 U12 U23 U34 = TMC6300; PROD_ID: IC-17193
U2 U17 U28 U39 = SparkFun-IC-Power; PROD_ID: VREG-12457
U3 U13 U24 U35 = SparkFun-RF; PROD_ID: IC-15676
U4 U14 U25 U36 = SparkFun-IC-Comms; PROD_ID: IC-14038
U5 U15 U26 U37 = SparkFun-DiscreteSemi; PROD_ID: IC-13538
U6 U18 U29 U40 = SparkFun-IC-Power; PN: AP63357DV-7; PROD_ID: VREG-17224
U7 U10 U11 U19-U21 U30-U32 U41-U43 = INA240A1; PROD_ID: IC-18906
U8 U16 U27 U38 = TMAG5273; PROD_ID: ROB-18440
U9 U22 U33 U44 = SparkFun-IC-Amplifiers; PROD_ID: IC-08251
U$2 U$68 U$129 U$190 = OT-EM3215
U$3-U$44 U$46-U$58 U$60-U$65 U$67 U$69-U$122 U$124-U$126 U$128 U$130-U$183 U$185-U$187 U$189 U$191-U$244 = output